# Allegro board Netduino3Wifi_13Dec16.brd
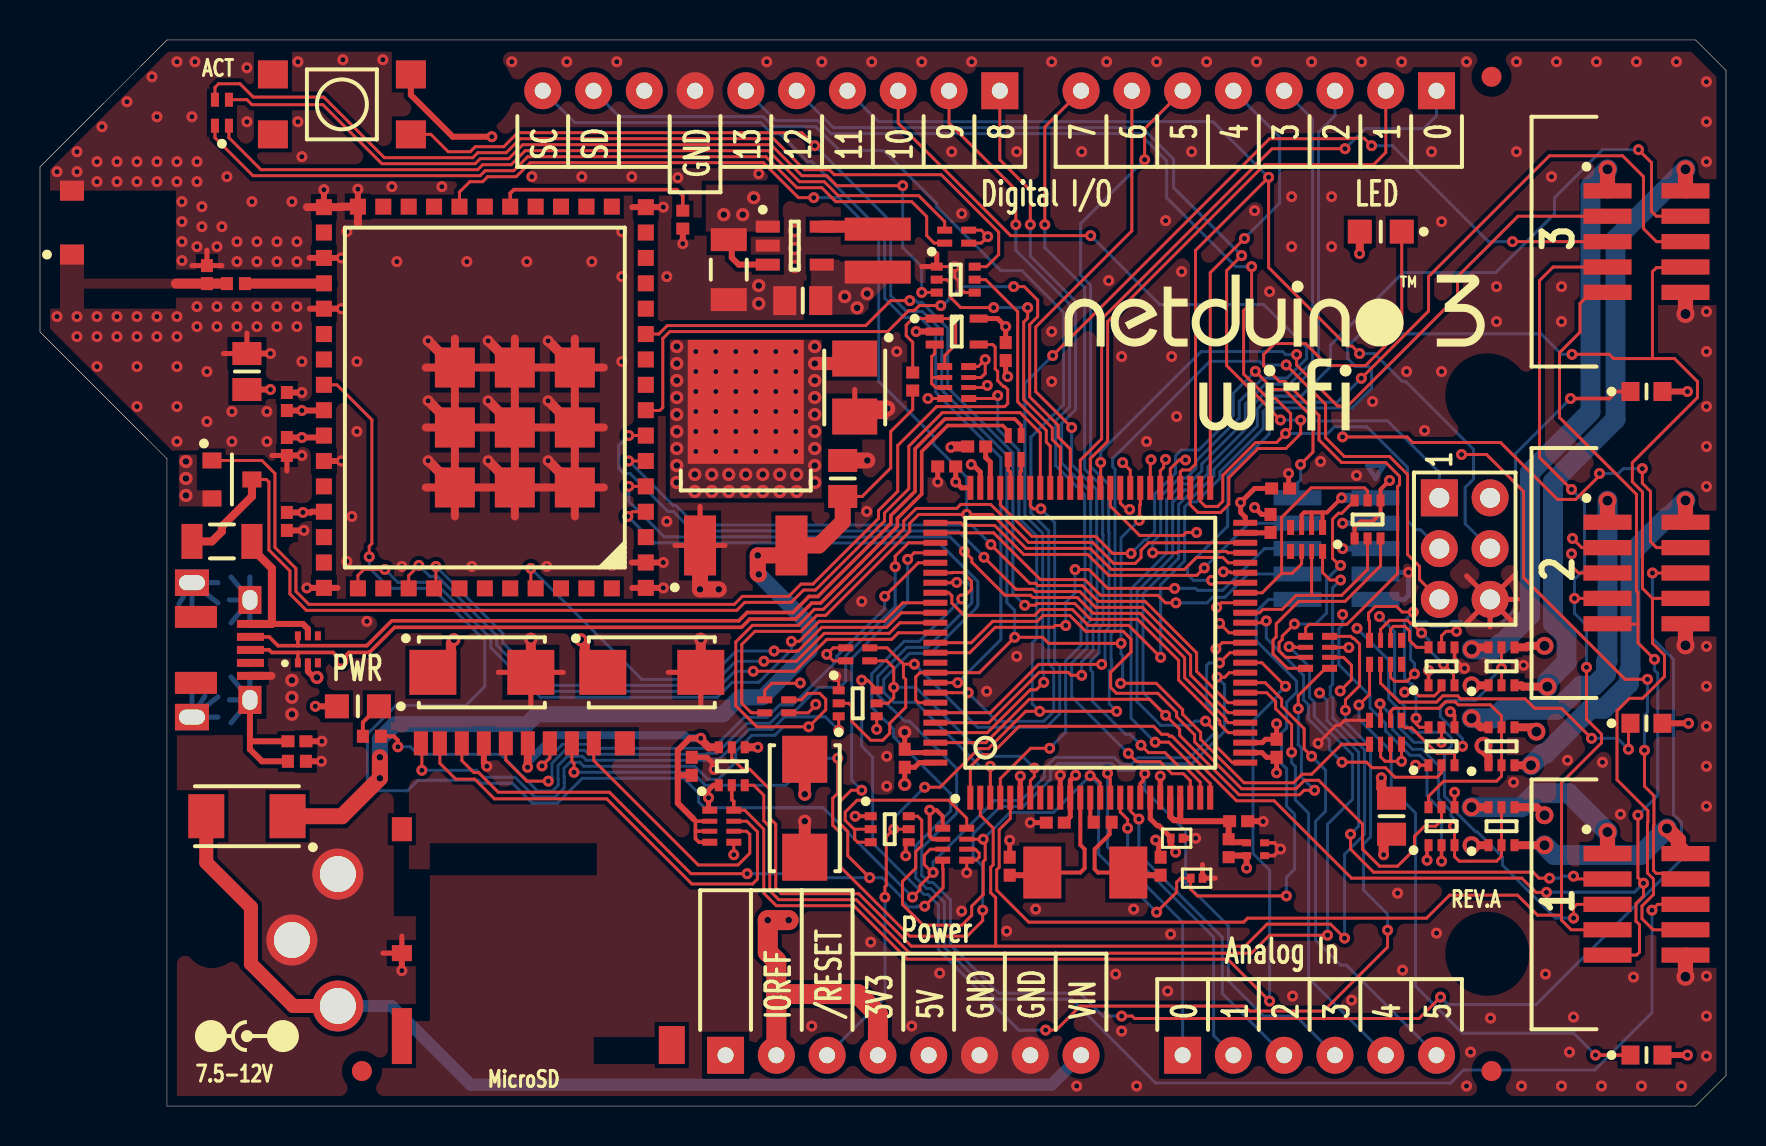
[diagram p0: board, top side]
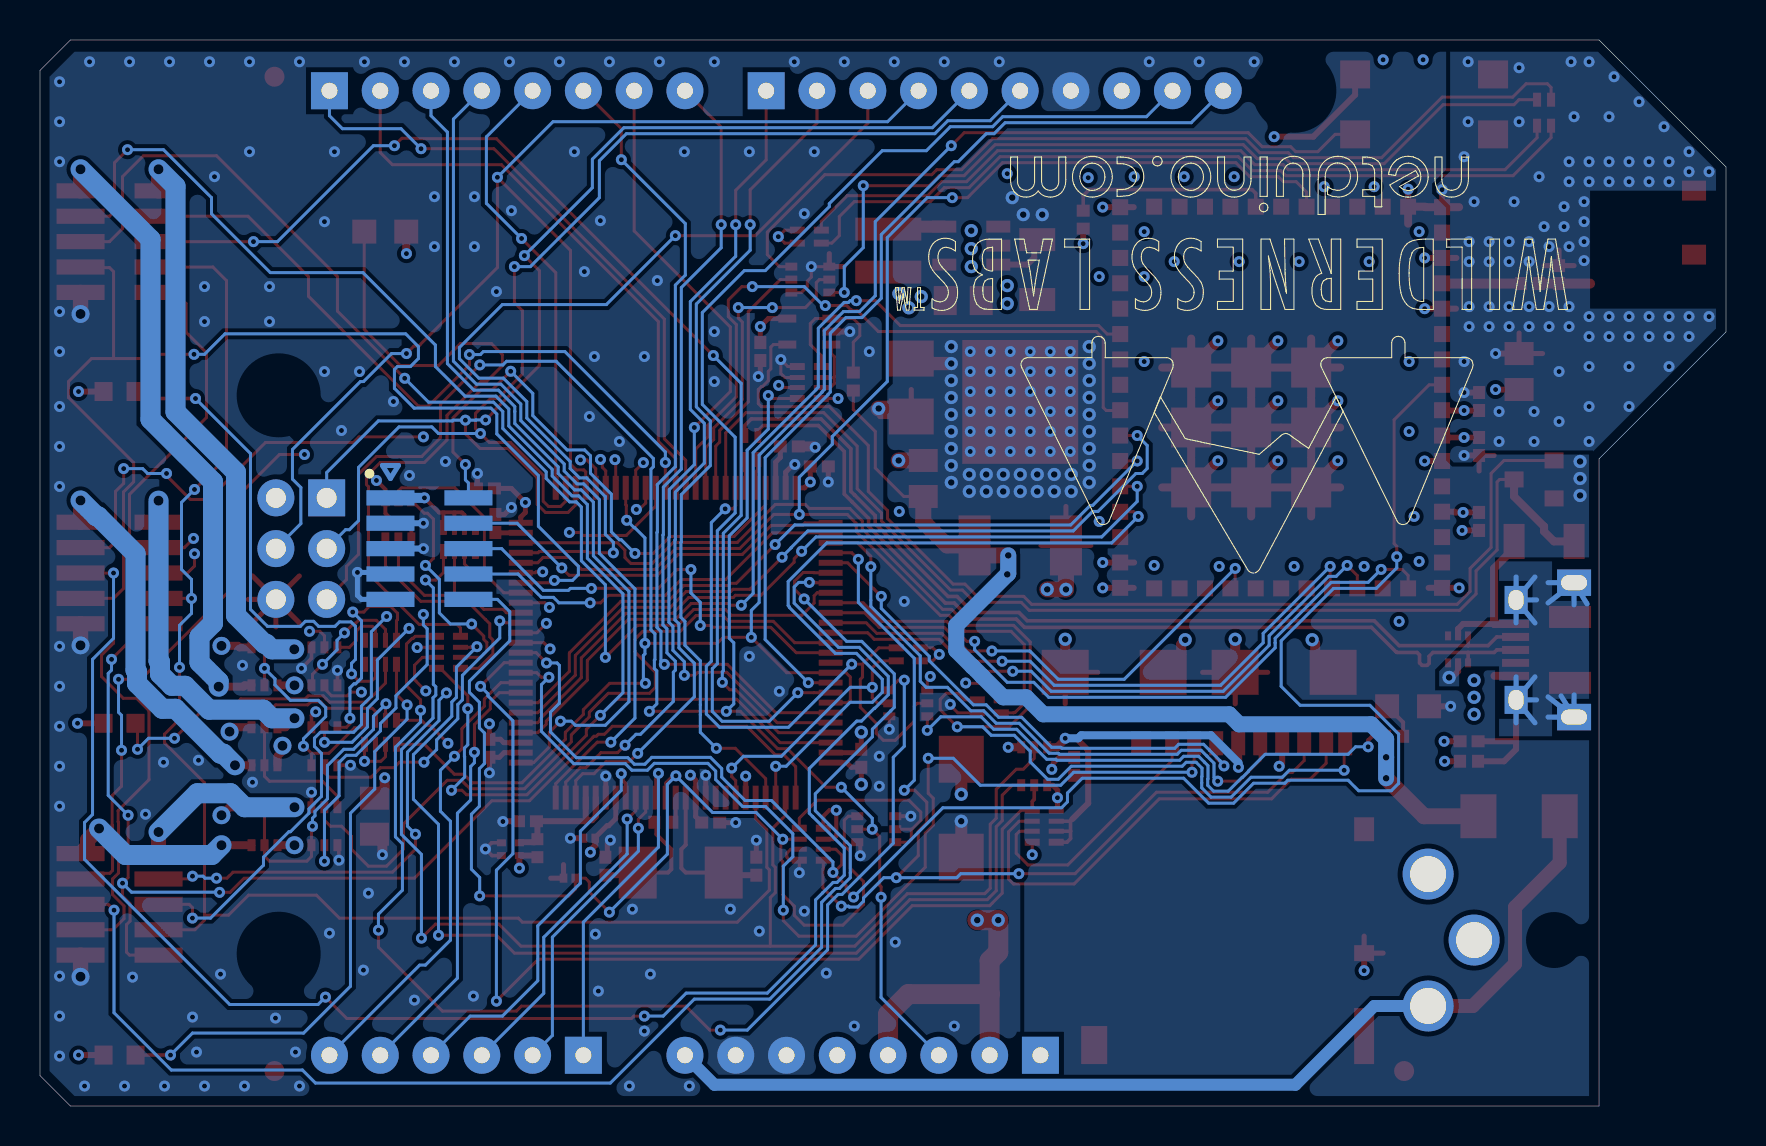
[diagram p1: board, bottom side, seen from below]

Outline 84.33 x 53.34 mm; copper layers: TOP, L2-GND, L3-PWR, BOTTOM. Coordinates in mm from the lower left corner of the outline.
Outline path: 0,46.99 0,38.73 6.35,32.38 6.35,0 82.8,0 84.33,1.52 84.33,51.82 82.8,53.34 6.35,53.34 0,46.99

## Placement (name value [footprint] x y rotation side)
C1  22uF  [CAPC3216X180N]  34.45 41.85 270 top
C2  10uF  [CAPC2012X125N]  40.15 31.4 90 top
C4  22uF  [CAPC2012X125N]  38.15 40.3 180 top
C5  0.1uF  [CAPC1005X55N]  59.95 14.25 0 top
C6  0.1uF  [CAPC1005X55N]  48.3 37.75 270 top
C7  1uF  [GNM1M2]  60.8 12.85 0 top
C9  0.1uF  [CAP-0201]  56.85 13.4 0 top
C10  0.1uF  [CAPC1005X55N]  50.78 14.18 180 top
C11  0.1uF  [CAPC1005X55N]  61.85 17.9 270 top
C12  0.1uF  [CAPC1005X55N]  62.05 30.9 0 top
C13  0.1uF  [CAPC1005X55N]  45.35 32 180 top
C14  0.1uF  [CAPC1005X55N]  43.25 17.4 90 top
C16  0.1uF  [CAPC1005X55N]  46.85 33 180 top
C17  2.2uF  [CAPC1005X55N]  61.55 29.15 90 top
C18  18pF  [CAPC1005X55N]  48.5 12 90 top
C19  18pF  [CAPC1005X55N]  56.05 12 90 top
C20  4.7nF  [CAPC1005X55N]  12.85 18.25 180 top
C21  100uF  [CAPMP6032X280N]  38.25 14.9 270 top
C22  0.1uF  [CAPC1005X55N]  32.6 17 90 top
C42  22uF  [CAPC2012X125N]  67.6 14.5 270 top
C43  47uF  [F931A476MBA]  40.75 35.95 270 top
C44  1pF  [CAPC1005X55N]  8.35 41.6 90 top
C47  22uF  [CAPC2012X125N]  10.35 36.75 90 top
C48  0.1uF  [CAPC1005X55N]  12.35 29.25 270 top
C49  0.1uF  [CAPC1005X55N]  12.35 35.25 90 top
C50  0.1uF  [CAPC1005X55N]  12.35 33 270 top
C51  100uF  [CAPMP6032X280N]  22.1 21.7 0 top
C52  100uF  [CAPMP6032X280N]  30.6 21.7 0 top
C53  0.1uF  [CAP-0201]  57.85 11.4 0 top
D1  WHITE  [LEDC2012X110N]  15.9 20 180 top
D2  BLUE  [LEDC2012X110N]  67.06 43.75 180 top
D3  SS15E-TP  [SS15-TP]  10.35 14.5 180 top
D4  -  [SP3003-04XTG]  13.4 22.85 90 top
D5  BLUE  [LEDC1608X80N]  80.35 2.55 0 top
D6  BLUE  [LEDC1608X80N]  80.35 19.15 0 top
D7  BLUE  [LEDC1608X80N]  80.35 35.75 0 top
D9  LTST-C295KGKSKT  [LTST-C295]  9.1 49.7 90 top
F1  MF-NSMF075-2  [RESC3216X100N]  9.1 28.25 180 top
F2  -  [FID_1-00_X_2-00]  16.1 1.75 0 top
F3  -  [FID_1-00_X_2-00]  72.6 1.75 0 top
F4  -  [FID_1-00_X_2-00]  72.6 51.5 0 top
J1  -  [ADC-043A-1]  14.9 8.31 90 top
J2  HDR100IMP08F-G-V-TH-BLUE  [HDR100IMP08F-G-V-TH]  69.85 50.8 180 top
J3  HDR100IMP08F-G-V-TH-BLUE  [HDR100IMP10F-G-V-TH]  48.01 50.8 180 top
J4  HDR100IMP08F-G-V-TH-BLUE  [HDR100IMP06F-G-V-TH]  57.15 2.54 0 top
J5  -  [DX4R005JJ2R1800]  6.35 22.82 270 top
J6  HDR100IMP08F-G-V-TH-BLUE  [HDR100IMP08F-G-V-TH]  34.29 2.54 0 top
J7  -  [67996-206HLF]  69.99 30.43 270 top
J8  -  [MINI_JTAG_SMD]  64.85 27.89 180 bottom
J9  DM3AT-SF-PEJM5  [DM3AT-SF-PEJ]  27.7 17.55 0 top
J10  HDR050IDC10MS2-G-V-SM-BLUE  [20021521-00010T1LF]  80.35 10.09 0 top
J11  HDR050IDC10MS2-G-V-SM-BLUE  [20021521-00010T1LF]  80.35 26.67 0 top
J12  HDR050IDC10MS2-G-V-SM-BLUE  [20021521-00010T1LF]  80.35 43.25 0 top
J13  2.45GHz Antenna  [AH316M245001-T]  1.6 44.2 90 top
L1  2.2uH  [LQH3NPN2R2NM0L]  41.9 42.8 270 top
L2  BEAD FERRITE/SM  [INDC1005X55N]  59.45 12.9 270 top
L3  3.6nH  [RESC1005X40AN]  9.8 41.15 180 top
MT1  -  [MTG320H420NP_720KO]  21.59 50.8 0 top
MT2  -  [MTG320H420NP_720KO]  72.39 35.56 0 top
MT3  -  [MTG320H420NP_720KO]  72.39 7.62 0 top
NOREF  -  []  10.35 3.5 0 top
NOREF#2  -  []  0 38.73 90 top
NOREF#3  -  []  6.35 32.38 90 top
NOREF#4  -  []  6.35 53.34 0 top
NOREF#5  -  []  6.35 0 90 top
NOREF#6  -  []  51.25 38 0 top
NOREF#7  -  []  0 46.99 0 top
NOREF#8  -  []  0 46.99 0 top
Q1  -  [MUN5215DW1T1G]  40.9 20.15 0 top
Q2  -  [MUN5215DW1T1G]  42.5 13.85 0 top
Q3  -  [NTR4101PT1G]  9.6 31.35 0 top
Q4  -  [NTJD4152PT1G]  34.6 17 90 top
Q5  -  [NTJD4152PT1G]  73.1 14 90 top
Q6  -  [MUN5215DW1T1G]  70.1 14 90 top
Q7  -  [NTJD4152PT1G]  73.1 18 90 top
Q8  -  [NTJD4152PT1G]  66.4 29.35 90 top
Q9  -  [NTJD4152PT1G]  73.1 22 90 top
Q10  -  [MUN5215DW1T1G]  70.1 18 90 top
Q11  -  [MUN5215DW1T1G]  70.1 22 90 top
Q12  -  [MUN5215DW1T1G]  45.8 41.35 0 top
R1  1K  [RESCAV50P80X160X60-8N]  63.9 22.7 0 top
R3  1.5K  [RESC1005X40AN]  16.6 18.5 0 top
R4  10K  [RESCAV50P80X160X60-8N]  45.85 36.2 0 top
R5  10K  [RESCAV50P80X160X60-8N]  45.75 13.1 0 top
R6  15.4K  [RESC1005X40AN]  43.65 36.25 90 top
R7  390  [RESC1005X40AN]  53.15 14.2 180 top
R8  10K  [EXB24V]  40.9 22.6 0 top
R9  22  [EXB24V]  48.75 32.95 270 top
R10  1M  [RESC1005X40AN]  12.85 17.25 180 top
R11  10K  [RESCAV50P80X160X60-8N]  34.1 14 0 top
R12  10K  [RESCAV50P80X160X60-8N]  67.3 18.7 90 top
R13  10K  [EXB24V]  36.85 20 0 top
R14  10K  [RESCAV50P80X160X60-8N]  63.35 28.35 270 top
R15  1K  [RESCAV50P80X160X60-8N]  67.3 22.7 90 top
R16  1.5K  [EXB24V]  45.85 43.5 180 top
R18  100K  [RESC1005X40AN]  32.15 44.35 270 top
SW1  -  [TSXH-2GL]  15.1 50.12 0 top
U1  LM3671MF-3.3/NOPB  [LM3671MF]  37.75 43.05 0 top
U2  -  [TLV1117-50IKVURG3]  35.3 28.05 90 top
U3  -  [LMV321IDCKR]  45.85 38.75 0 top
U4  STM32F427  [STM32F427VIT6]  52.53 23.18 90 top
U5  -  [CC3100MOD]  22.25 35.45 90 top
Y1  25.00MHz  [ABM7]  52.28 11.68 180 top

## Library data of the parts
C1 C2 C4-C6 C9-C14 C16-C22 C42-C44 C47-C53 = C
C7 = GNM1M2
D1 = LED_2
D2 D5-D7 = LED_1
D3 = D05AZ75_0
D4 = HEADER 6_0
D9 = LED_0
F1 = FUSE
F2-F4 MT1-MT3 = MOUNT_HOLE
J1 = HEADER 3
J2 J6 = HEADER 8
J3 = HEADER 10
J4 = HEADER 6
J5 = HEADER 11_0
J7 = HEADER 6_1
J8 J10-J12 = HEADER 10_2
J9 = HEADER 10_4
J13 = HEADER 2_0
L1 L3 = L
L2 = BEAD FERRITE/SM
Q1 Q2 Q12 = MUN5215DW1T1G_3
Q3 = NDF0610/TO_1
Q4 Q5 Q7-Q9 = NTJD4152PT1G
Q6 Q10 Q11 = MUN5215DW1T1G_0
R1 R4 R5 R11 R12 R14 R15 = RESCAV50P80X160X60-8N
R3 R6 R7 R10 R18 = R
R8 R9 R13 R16 = EXB24V
SW1 = SW PUSHBUTTON-SPST-2_0
U1 = HEADER 5_0
U2 = LM7805/TO_2
U3 = LMV321/SO
U4 = STM32F427_0
U5 = CC3100MOD_WIFI_MODULE_1
Y1 = CRYSTAL

## Footprints (pads in the part's own frame, mm; a bottom-side part is the same pattern mirrored in y, then rotated)
67996-206HLF
  rect 1.85x1.85 hole 1: 1(0,0)
  round 1.85 hole 1: 2(0,2.54) 3(2.54,0) 4(2.54,2.54) 5(5.08,0) 6(5.08,2.54)
20021521-00010T1LF
  rect 2.4x0.76 smd: 1(-1.95,2.54) 2(1.95,2.54) 3(-1.95,1.27) 4(1.95,1.27) 5(-1.95,0) 6(1.95,0) 7(-1.95,-1.27) 8(1.95,-1.27) 9(-1.95,-2.54) 10(1.95,-2.54)
ABM7
  rect 1.9x2.6 smd: 1(-2.15,0) 2(2.15,0)
ADC-043A-1
  round 0 hole 2.4 unplated: (0,6.3)
  round 2.55 hole 1.8: 1(-3.3,0) 2(0,2.3) 3(3.3,0)
AH316M245001-T
  rect 1x1.2 smd: 1(-1.6,0) 2(1.6,0)
CAP-0201
  rect 0.381x0.457 smd: 1(-0.292,0) 2(0.292,0)
CAPC1005X55N
  rect 0.65x0.6 smd: 1(-0.45,0) 2(0.45,0)
CAPC2012X125N
  rect 1.15x1.45 smd: 1(-0.9,0) 2(0.9,0)
CAPC3216X180N
  rect 1.15x1.8 smd: 1(-1.5,0) 2(1.5,0)
CAPMP6032X280N
  rect 2.35x2.25 smd: 1(-2.45,0) 2(2.45,0)
CC3100MOD
  rect 0.8x0.8 smd: 1(-9.525,-8.05) 2(-8.255,-8.05) 3(-6.985,-8.05) 4(-5.715,-8.05) 5(-4.445,-8.05) 6(-3.175,-8.05) 7(-1.905,-8.05) 8(-0.635,-8.05) 9(0.635,-8.05) 10(1.905,-8.05) 11(3.175,-8.05) 12(4.445,-8.05) 13(5.715,-8.05) 14(6.985,-8.05) 15(8.255,-8.05) 16(9.525,-8.05) 17(9.55,-6.35) 18(9.55,-5.08) 19(9.55,-3.81) 20(9.55,-2.54) 21(9.55,-1.27) 22(9.55,0) 23(9.55,1.27) 24(9.55,2.54) 25(9.55,3.81) 26(9.55,5.08) 27(9.55,6.35) 28(9.525,8.05) 29(8.255,8.05) 30(6.985,8.05) 31(5.715,8.05) 32(4.445,8.05) 33(3.175,8.05) 34(1.905,8.05) 35(0.635,8.05) 36(-0.635,8.05) 37(-1.905,8.05) 38(-3.175,8.05) 39(-4.445,8.05) 40(-5.715,8.05) 41(-6.985,8.05) 42(-8.255,8.05) 43(-9.525,8.05) 44(-9.55,6.35) 45(-9.55,5.08) 46(-9.55,3.81) 47(-9.55,2.54) 48(-9.55,1.27) 49(-9.55,0) 50(-9.55,-1.27) 51(-9.55,-2.54) 52(-9.55,-3.81) 53(-9.55,-5.08) 54(-9.55,-6.35)
  rect 2x2 smd: 55(-4.5,-4.5) 56(-1.5,-4.5) 57(1.5,-4.5) 58(-4.5,-1.5) 59(-1.5,-1.5) 60(1.5,-1.5) 61(-4.5,1.5) 62(-1.5,1.5) 63(1.5,1.5)
DM3AT-SF-PEJ
  rect 0.7x1.2 smd: 1(0,0.6) 2(-1.1,0.6) 3(-2.2,0.6) 4(-3.3,0.6) 5(-4.4,0.6) 6(-5.5,0.6) 7(-6.6,0.6) 8(-7.7,0.6) 9(-8.65,0.6)
  rect 1x0.8 smd: 10(-9.6,-9.9)
  rect 1x1.2 smd: 11(-9.6,-3.7) 14(1.55,0.6)
  rect 1x2.8 smd: 12(-9.6,-14.05)
  rect 1.3x1.9 smd: 13(3.9,-14.5)
DX4R005JJ2R1800
  rect 0.4x1.35 smd: 1(-1.3,4.175) 2(-0.65,4.175) 3(0,4.175) 4(0.65,4.175) 5(1.3,4.175)
  rect 1.4x1.15 hole 1x0.75: 6(-2.5,4.15) 7(2.5,4.15)
  rect 1.325x1.7 hole 0.75x1.3: 8(-3.362,1.25) 11(3.362,1.25)
  rect 1.1x2.1 smd: 9(-1.65,1.45) 10(1.65,1.45)
EXB24V
  rect 0.75x0.35 smd: 1(-0.6,0.325) 2(-0.6,-0.325) 3(0.6,-0.325) 4(0.6,0.325)
F931A476MBA
  rect 1.8x2.25 smd: 1(-1.45,0) 2(1.45,0)
FID_1-00_X_2-00
  round 1 smd: 1(0,0)
GNM1M2
  rect 0.45x0.35 smd: 1(-0.45,0.32) 2(-0.45,-0.32) 3(0.45,-0.32) 4(0.45,0.32)
HDR100IMP06F-G-V-TH
  rect 1.85x1.85 hole 0.8: 1(0,0)
  round 1.85 hole 0.8: 2(2.54,0) 3(5.08,0) 4(7.62,0) 5(10.16,0) 6(12.7,0)
HDR100IMP08F-G-V-TH
  rect 1.85x1.85 hole 0.8: 1(0,0)
  round 1.85 hole 0.8: 2(2.54,0) 3(5.08,0) 4(7.62,0) 5(10.16,0) 6(12.7,0) 7(15.24,0) 8(17.78,0)
HDR100IMP10F-G-V-TH
  rect 1.85x1.85 hole 0.8: 1(0,0)
  round 1.85 hole 0.8: 2(2.54,0) 3(5.08,0) 4(7.62,0) 5(10.16,0) 6(12.7,0) 7(15.24,0) 8(17.78,0) 9(20.32,0) 10(22.86,0)
INDC1005X55N
  rect 0.6x0.6 smd: 1(-0.45,0) 2(0.45,0)
LEDC1608X80N
  rect 0.899x0.95 smd: A(0.8,0) C(-0.8,0)
LEDC2012X110N
  rect 1.2x1.2 smd: A(1.05,0) C(-1.05,0)
LM3671MF
  rect 1.2x0.6 smd: 1(-1.35,0.95) 2(-1.35,0) 3(-1.35,-0.95) 4(1.35,-0.95) 5(1.35,0.95)
LMV321IDCKR
  rect 0.9x0.4 smd: 1(-1.1,0.65) 2(-1.1,0) 3(-1.1,-0.65) 4(1.1,-0.65) 5(1.1,0.65)
LQH3NPN2R2NM0L
  rect 1.15x3.3 smd: 1(-1.075,0) 2(1.075,0)
LTST-C295
  rect 0.7x0.4 smd: 1(-0.65,0.35) 2(-0.65,-0.35) 3(0.65,0.35) 4(0.65,-0.35)
MINI_JTAG_SMD
  rect 2.4x0.76 smd: 1(-1.95,2.54) 2(1.95,2.54) 3(-1.95,1.27) 4(1.95,1.27) 5(-1.95,0) 6(1.95,0) 7(-1.95,-1.27) 8(1.95,-1.27) 9(-1.95,-2.54) 10(1.95,-2.54)
MTG320H420NP_720KO
  round 0 hole 3.2 unplated: (0,0)
MUN5215DW1T1G
  rect 0.6x0.4 smd: 1(-0.95,0.65) 2(-0.95,0) 3(-0.95,-0.65) 4(0.95,-0.65) 5(0.95,0) 6(0.95,0.65)
NTJD4152PT1G
  rect 0.6x0.4 smd: 1(-0.95,0.65) 2(-0.95,0) 3(-0.95,-0.65) 4(0.95,-0.65) 5(0.95,0) 6(0.95,0.65)
NTR4101PT1G
  rect 0.95x0.8 smd: 1(-1,0.95) 2(-1,-0.95) 3(1,0)
RESC1005X40AN
  rect 0.6x0.65 smd: 1(-0.45,0) 2(0.45,0)
RESC3216X100N
  rect 1.05x1.75 smd: 1(-1.5,0) 2(1.5,0)
RESCAV50P80X160X60-8N
  rect 0.75x0.35 smd: 1(-0.6,0.8) 4(-0.6,-0.8) 5(0.6,-0.8) 8(0.6,0.8)
  rect 0.75x0.25 smd: 2(-0.6,0.25) 3(-0.6,-0.25) 6(0.6,-0.25) 7(0.6,0.25)
SP3003-04XTG
  rect 0.45x0.3 smd: 1(-0.675,0.5) 2(-0.675,0) 3(-0.675,-0.5) 4(0.675,-0.5) 5(0.675,0) 6(0.675,0.5)
SS15-TP
  rect 1.8x2.2 smd: A(2.032,0) C(-2.032,0)
STM32F427VIT6
  rect 1.2x0.3 smd: 1(-7.75,6) 2(-7.75,5.5) 3(-7.75,5) 4(-7.75,4.5) 5(-7.75,4) 6(-7.75,3.5) 7(-7.75,3) 8(-7.75,2.5) 9(-7.75,2) 10(-7.75,1.5) 11(-7.75,1) 12(-7.75,0.5) 13(-7.75,0) 14(-7.75,-0.5) 15(-7.75,-1) 16(-7.75,-1.5) 17(-7.75,-2) 18(-7.75,-2.5) 19(-7.75,-3) 20(-7.75,-3.5) 21(-7.75,-4) 22(-7.75,-4.5) 23(-7.75,-5) 24(-7.75,-5.5) 25(-7.75,-6) 51(7.75,-6) 52(7.75,-5.5) 53(7.75,-5) 54(7.75,-4.5) 55(7.75,-4) 56(7.75,-3.5) 57(7.75,-3) 58(7.75,-2.5) 59(7.75,-2) 60(7.75,-1.5) 61(7.75,-1) 62(7.75,-0.5) 63(7.75,0) 64(7.75,0.5) 65(7.75,1) 66(7.75,1.5) 67(7.75,2) 68(7.75,2.5) 69(7.75,3) 70(7.75,3.5) 71(7.75,4) 72(7.75,4.5) 73(7.75,5) 74(7.75,5.5) 75(7.75,6)
  rect 0.3x1.2 smd: 26(-6,-7.75) 27(-5.5,-7.75) 28(-5,-7.75) 29(-4.5,-7.75) 30(-4,-7.75) 31(-3.5,-7.75) 32(-3,-7.75) 33(-2.5,-7.75) 34(-2,-7.75) 35(-1.5,-7.75) 36(-1,-7.75) 37(-0.5,-7.75) 38(0,-7.75) 39(0.5,-7.75) 40(1,-7.75) 41(1.5,-7.75) 42(2,-7.75) 43(2.5,-7.75) 44(3,-7.75) 45(3.5,-7.75) 46(4,-7.75) 47(4.5,-7.75) 48(5,-7.75) 49(5.5,-7.75) 50(6,-7.75) 76(6,7.75) 77(5.5,7.75) 78(5,7.75) 79(4.5,7.75) 80(4,7.75) 81(3.5,7.75) 82(3,7.75) 83(2.5,7.75) 84(2,7.75) 85(1.5,7.75) 86(1,7.75) 87(0.5,7.75) 88(0,7.75) 89(-0.5,7.75) 90(-1,7.75) 91(-1.5,7.75) 92(-2,7.75) 93(-2.5,7.75) 94(-3,7.75) 95(-3.5,7.75) 96(-4,7.75) 97(-4.5,7.75) 98(-5,7.75) 99(-5.5,7.75) 100(-6,7.75)
TLV1117-50IKVURG3
  rect 3x1.6 smd: 1(0,2.286) 3(0,-2.286)
  rect 6.2x5.8 smd: 4(7.18,0)
TSXH-2GL
  rect 1.5x1.4 smd: 1(-3.45,1.5) 2(3.45,1.5) 3(-3.45,-1.5) 4(3.45,-1.5)

## Nets
3V3_GOPORT1: J10.1(3V3) Q5.6(DRAIN)
3V3_GOPORT2: J11.1(3V3) Q7.6(DRAIN)
3V3_GOPORT3: J12.1(3V3) Q9.6(DRAIN)
5V_GOPORT1: J10.2(5V) Q5.3(DRAIN)
5V_GOPORT2: J11.2(5V) Q7.3(DRAIN)
5V_GOPORT3: J12.2(5V) Q9.3(DRAIN)
+3.3V: C4.1 C7.2(1) C9.1 C10.1 C11.1 C12.1 C13.1 C14.1 C21.1 C42.1 C47.1 C48.1 C49.1 C50.1 C51.1 C52.1 J6.2 J6.4 J8.1(VCC) L1.2 L2.2 Q4.1(SOURCE) Q4.4(SOURCE) Q5.1(SOURCE) Q7.1(SOURCE) Q8.1(SOURCE) Q8.4(SOURCE) Q9.1(SOURCE) R4.4(1) R5.1 R5.2(1) R8.1 R8.2(1) R11.1 R13.1 R14.1 R14.2(1) R14.3(1) R16.1 R16.2(1) SW1.2 U1.4(FB) U4.6(VBAT) U4.11(VDD1) U4.19(VDD2) U4.28(VDD3) U4.50(VDD4) U4.75(VDD5) U4.100(VDD6) U5.36(VBAT_IN1) U5.37(VBAT_IN2) U5.40(VBAT_IN3)
+3V3_MICROSD: C22.1 J9.4(VDD) Q4.6(DRAIN) R11.2(1) R11.3(1) R11.4(1)
+5.0V: C1.1 C6.1 C43.1 D1.A(ANODE) D2.A(ANODE) D5.A(ANODE) D6.A(ANODE) D7.A(ANODE) J6.5 J7.2(VTG) Q3.2(SOURCE) Q5.4(SOURCE) Q7.4(SOURCE) Q9.4(SOURCE) R4.6(2) R12.2(1) R12.3(1) R12.4(1) U1.1(VIN) U1.3(EN) U2.4(VOUT) U3.5(+VCC)
+VIN: D3.A(1) J1.1 J6.8
+VIN_PROTECTED: C2.1 D3.C(2) R6.1 U2.3(VIN)
GND: C1.2 C2.2 C4.2 C5.2 C6.2 C7.3 C7.4(3) C9.2 C10.2 C11.2 C12.2 C13.2 C14.2 C16.2 C17.2 C18.2 C19.2 C20.1 C21.2 C22.2 C42.2 C43.2 C44.1 C44.2 C47.2 C48.2 C49.2 C50.2 C51.2 C52.2 C53.2 J1.2 J1.3 J3.7 J5.5(GND) J6.6 J6.7 J7.6(GND) J8.3(GND1) J8.5(GND2) J8.7(GND3) J8.9(GND4) J9.6(VSS) J9.10(SW_GND) J10.10(GND) J11.10(GND) J12.10(GND) J13.1 J13.2 L3.2 Q1.1(E) Q1.4(E) Q2.1(E) Q2.4(E) Q6.1(E) Q6.4(E) Q10.1(E) Q10.4(E) Q11.1(E) Q11.4(E) Q12.1(E) Q12.4(E) R4.7(2) R4.8(2) R5.5(2) R5.6(2) R10.1 R11.5(2) R12.8(2) R13.3(2) R18.2 U1.2(GND) U2.1(GND) U3.2(-VCC) U4.10(VSS1) U4.20(VSSA) U4.27(VSS2) U4.74(VSS3) U4.99(VSS4) U5.1(GND1) U5.2(GND2) U5.16(GND3) U5.27(GND4) U5.28(GND18) U5.30(GND5) U5.32(GND6) U5.38(GND7) U5.43(GND8) U5.55(GND9) U5.56(GND10) U5.57(GND11) U5.58(GND12) U5.59(GND13) U5.60(GND14) U5.61(GND15) U5.62(GND16) U5.63(GND17)
VIN_COMP_LOGIC: Q3.1(GATE) U3.4(OUT)
VIN_REF: R4.2(1) R4.3(1) U3.3(-VIN)
/CC_CS: U4.65(PC8) U5.8(SPI_CS)
/CC_HIB: U4.3(PE4) U5.4(NHIB)
/CC_RESET: R5.3(1) U4.37(PB2) U5.35(RESRT_N)
/ENABLE_UART_TX_PULLUP_GOPORT1: Q4.5(GATE) R14.8(2) U4.2(PE3)
/ENABLE_UART_TX_PULLUP_GOPORT2: Q8.2(GATE) R14.7(2) U4.41(PE10)
/ENABLE_UART_TX_PULLUP_GOPORT3: Q8.5(GATE) R14.6(2) U4.43(PE12)
/EXTERNAL_RESET: J6.3 J7.5(R\E\S\E\T\) Q2.5(B) R4.5(2)
/INT_GOPORT1: J10.3(GIPO) U4.60(PD13)
/INT_GOPORT2: J11.3(GIPO) U4.61(PD14)
/INT_GOPORT3: J12.3(GIPO) U4.62(PD15)
/MICRO_SD_CARD_INSERTED: J9.9(C\A\R\D\_\I\N\_\S\W\) R13.4(2) U4.48(PB11)
/MICROSD_CS: J9.2(C\S\) U4.35(PB0)
/PWR_CTRL_GOPORT1: Q5.2(GATE) Q5.5(GATE) Q6.3(C) R12.7(2)
/PWR_CTRL_GOPORT2: Q6.6(C) Q7.2(GATE) Q7.5(GATE) R12.6(2)
/PWR_CTRL_GOPORT3: Q9.2(GATE) Q9.5(GATE) Q10.3(C) R12.5(2)
/PWR_CTRL_MICROSD: Q4.2(GATE) R11.8(2) U4.36(PB1)
/RESET_MCU: C53.1 J8.10(NRST) Q2.6(C) R5.7(2) U4.14(NRST)
/SPI_CS_GOPORT1: J10.6(SPI_CS) U4.81(PD0)
/SPI_CS_GOPORT2: J11.6(SPI_CS) U4.82(PD1)
/SPI_CS_GOPORT3: J12.6(SPI_CS) U4.83(PD2)
A0: J4.1 U4.15(PC0)
A1: J4.2 U4.16(PC1)
A2: J4.3 U4.17(PC2)
A3: J4.4 U4.18(PC3)
A4: J4.5 U4.33(PC4)
A5: J4.6 U4.34(PC5)
CC_CTS: U4.85(PD4) U5.51(UART1_CTS)
CC_IRQ: U4.29(PA4) U5.11(I\RQ)
CC_MISO: U4.31(PA6) U5.7(SPI_DOUT)
CC_MOSI: U4.32(PA7) U5.6(SPI_DIN)
CC_RTS: U4.84(PD3) U5.44(UART1_RTS)
CC_RX: U4.86(PD5) U5.47(UART1_RX)
CC_SCK: U4.30(PA5) U5.5(SPI_CLK)
CC_TCXO_EN/SOP2: R13.2(1) U4.46(PE15) U5.23(SOP2)
CC_TX: U4.87(PD6) U5.46(UART1_TX)
D0: J2.1 U4.64(PC7)
D1: J2.2 U4.63(PC6)
D2: J2.3 U4.26(PA3)
D3: J2.4 U4.25(PA2)
D4: J2.5 U4.51(PB12)
D5: J2.6 U4.95(PB8)
D6: J2.7 U4.96(PB9)
D7: J2.8 U4.24(PA1)
D8: J3.1 U4.23(PA0)
D9: J3.2 U4.4(PE5)
D10: J3.3 U4.47(PB10)
D11: J3.4 J7.4(MOSI) U4.54(PB15)
D12: J3.5 J7.1(MISO) U4.53(PB14)
D13: J3.6 J7.3(SCK) U4.52(PB13)
JTCK: J8.4(JTCK) U4.76(PA14)
JTDI: J8.8(JTDI) U4.77(PA15)
JTDO: J8.6(JTDO) U4.89(PB3)
JTMS: J8.2(JTMS) U4.72(PA13)
LED: Q1.2(B) R8.4(2) U4.69(PA10)
LED_GOPORT1: Q10.2(B) U4.40(PE9)
LED_GOPORT2: Q11.5(B) U4.42(PE11)
LED_GOPORT3: Q11.2(B) U4.45(PE14)
LINK_LED: Q12.2(B) U4.66(PC9)
OTG_FS_DM: R9.4(2) U4.70(PA11)
OTG_FS_DP: R9.3(2) U4.71(PA12)
PWR_LED: Q1.5(B) R8.3(2) U4.7(PC13)
PWR_ON_GOPORT1: Q6.5(B) U4.88(PD7)
PWR_ON_GOPORT2: Q6.2(B) U4.57(PD10)
PWR_ON_GOPORT3: Q10.5(B) U4.59(PD12)
SCL: J3.10 U4.92(PB6)
SDA: J3.9 U4.93(PB7)
SPI3_MISO: J9.7(DO) R5.4(1) U4.79(PC11)
SPI3_MOSI: J9.3(DI) U4.80(PC12)
SPI3_SCK: J9.5(CLK) U4.78(PC10)
SPI4_MISO: J10.8(SPI_MISO) J11.8(SPI_MISO) J12.8(SPI_MISO) U4.44(PE13)
SPI4_MOSI: J10.7(SPI_MOSI) J11.7(SPI_MOSI) J12.7(SPI_MOSI) U4.5(PE6)
SPI4_SCK: J10.9(SPI_SCK) J11.9(SPI_SCK) J12.9(SPI_SCK) U4.1(PE2)
STATE_LED: Q12.5(B) U4.67(PA8)
SWITCH1: R12.1 SW1.4 U4.58(PD11) U4.91(PB5) U4.94(BOOT0)
USART3_RX_GOPORT1: J10.5(USART_RX) U4.56(PD9)
USART3_TX_GOPORT1: J10.4(USART_TX) R1.7(2) U4.55(PD8)
USART7_RX_GOPORT2: J11.5(USART_RX) U4.38(PE7)
USART7_TX_GOPORT2: J11.4(USART_TX) R1.6(2) U4.39(PE8)
USART8_RX_GOPORT3: J12.5(USART_RX) U4.97(PE0)
USART8_TX_GOPORT3: J12.4(USART_TX) R1.5(2) U4.98(PE1)
USB5V: D4.5(VCC) F1.1 J5.1(VBUS)
USB5V_F: F1.2 Q3.3(DRAIN) U4.68(PA9)
USB_D+: D4.1(I/O1) J5.3(D+) R9.2(1)
USB_D-: D4.6(I/O4) J5.2(D-) R9.1
VCAP_1: C17.1 U4.49(VCAP_1)
VCAP_2: C16.1 U4.73(VCAP_2)
N61621: C20.2 D4.2(GND) J5.6(CHS1) J5.7(CHS2) J5.8(CHS3) J5.11(CHS4) R10.2
N62667: R4.1 R6.2 U3.1(+VIN)
N62753: Q2.2(B) Q2.3(C) R5.8(2)
N62779: L1.1 U1.5(SW)
N62801: D2.C(CATHODE) R1.1
N62883: J9.1(NC) R11.6(2)
N62887: J9.8(RSV) R11.7(2)
N63081: C5.1 C7.1 L2.1 U4.21(VREF+) U4.22(VDDA)
N63113: C18.1 U4.12(PH0) Y1.2
N63117: R7.2 U4.13(PH1)
N63121: C19.1 R7.1 Y1.1
N74908: Q1.6(C) R1.8(2)
N77511: D1.C(CATHODE) R3.1
N77515: Q1.3(C) R3.2
N83970: D9.4(CATHODE_4) Q12.3(C)
N84209: D9.3(CATHODE_1) Q12.6(C)
N89038: L3.1 U5.31(RF_BG)
N89104: D9.2(ANODE_2) R16.3(2)
N89108: D9.1(ANODE_1) R16.4(2)
N89134: R18.1 U5.21(RESERVED#21)
N197515: Q10.6(C) R15.8(2)
N197535: D5.C(CATHODE) R15.1
N197921: Q11.3(C) R15.7(2)
N197949: D6.C(CATHODE) R15.2(1)
N198166: Q11.6(C) R15.6(2)
N198194: D7.C(CATHODE) R15.3(1)
N199051: Q4.3(DRAIN) R1.2(1)
N202411: Q8.6(DRAIN) R1.3(1)
N203046: Q8.3(DRAIN) R1.4(1)

Pads without a net: D4 3 4; F2 1; F3 1; F4 1; J3 8; J5 4 9 10; J6 1; J9 11 12 13 14; R14 4 5; R15 4 5; SW1 1 3; U4 8 9 90; U5 3 9 10 12 13 14 15 17 18 19 20 22 24 25 26 29 33 34 39 41 42 45 48 49 50 52 53 54

## Via types
v1: diameter 0.55, hole 0.25, TOP to BOTTOM, 553 vias
v2: diameter 0.9, hole 0.5, TOP to BOTTOM, 21 vias
v3: diameter 0.66, hole 0.33, TOP to BOTTOM, 68 vias

## Routing (per net, layer and track width the routed paths; a pad name or vN(x,y) marks a point on that pad's centre or on a via; arc(x,y) is an arc through that point)
3V3_GOPORT1: length 9.8
  TOP w0.4: Q5.6 v2(71.6,14.95)
  TOP w0.76: J10.1 v2(78.4,13.71)
  BOTTOM w1: v2(71.6,14.95) 74.09,14.95 74.79,15.65 76.46,15.65 v2(78.4,13.71)
3V3_GOPORT2: length 18.5
  TOP w0.4: v2(71.6,19.4) 72.05,18.95 Q7.6
  TOP w0.76: J11.1 v2(78.4,30.29)
  BOTTOM w1: v2(78.4,30.29) 78.4,22.28 78.32,22.21 78.32,21.62 77.73,21.02 77.06,21.02 75.87,19.83 73.16,19.83 72.72,19.4 v2(71.6,19.4)
3V3_GOPORT3: length 29.5
  TOP w0.4: v2(71.61,22.85) 71.71,22.95 Q9.6
  TOP w0.76: J12.1 v2(78.4,46.87)
  BOTTOM w1: v2(78.4,46.87) 77.55,46.02 77.55,34.73 74.52,31.71 74.52,24.55 73.1,23.13 73.01,23.13 72.73,22.85 v2(71.61,22.85)
5V_GOPORT1: length 10
  TOP w0.4: Q5.3 v2(75.25,13.05)
  TOP w0.76: v2(81.37,13.89) 81.95,13.31 81.95,12.98 J10.2
  BOTTOM w1: v2(75.25,13.05) 75.74,12.56 80.05,12.56 v2(81.37,13.89)
5V_GOPORT2: length 18.9
  TOP w0.4: Q7.3 v2(74.57,17.05)
  TOP w0.76: v2(82.3,30.3) J11.2
  BOTTOM w1: v2(82.3,30.3) 81.5,29.5 81.42,29.5 79.55,27.64 79.55,21.81 79.47,21.73 79.47,21.14 78.21,19.88 77.55,19.88 75.3,17.63 75.16,17.63 v2(74.57,17.05)
5V_GOPORT3: length 32.1
  TOP w0.4: Q9.3 74.09,21.05 74.16,20.98 v2(75.39,20.98)
  TOP w0.76: J12.2 v2(82.3,46.87)
  BOTTOM w1: v2(82.3,46.87) 78.8,43.37 78.8,34.36 75.67,31.23 75.67,24.16 76.35,23.48 76.35,22.2 75.39,21.24 v2(75.39,20.98)
+3.3V: length 79.7
  TOP w0.15: R16.1 47.08,43.17 v1(47.4,43.5) 47.08,43.83 R16.2 ; R13.1 36.25,20.8 36.6,21.15 38.05,21.15 38.05,21.17 v1(38.03,21.17) ; R4.4 v1(44.41,35.4) ; R8.2 39.68,22.27 v1(39.35,22.6) 39.68,22.93 R8.1
  TOP w0.2: R5.1 45.15,14.5 44.85,14.8 v1(44.5,14.8) 44.5,13.5 44.65,13.35 R5.2 ; 64.15,29.7 R14.1 ; 64.15,29.7 63.6,29.7 ; 64.15,29.7 64.37,29.7 v1(65.1,30.43) ; 63.6,29.7 63.23,29.7 63.1,29.57 R14.3 ; 63.6,29.7 R14.2 ; v1(67.5,31.3) 67.05,30.85 Q8.4 67.05,29.65 66.65,29.25 66.05,29.25 65.75,28.95 Q8.1
  TOP w0.25: C9.1 56.56,13.44 55.97,14.03 55.88,14.03 55.53,14.38 U4.19 ; C12.1 60.75,30.9 v1(60.05,30.2) 60.05,29.7 60.28,29.47 U4.50 ; v3(43.25,16.09) C14.1 43.75,16.95 43.98,17.18 U4.100 ; U4.6 v1(49.03,16.51) ; U4.28 61.13,18.18 61.3,18.35 C11.1 v1(61.85,19.12) ; C13.1 v1(45.8,31.23) 46.09,30.93 U4.75 ; R11.1 33.44,14.86 v1(33.44,15.43) 33.43,15.44 33.43,15.8 33.68,16.05 Q4.1 ; C10.1 51.53,14.48 U4.11 51.53,16.3 51.78,16.55 51.79,16.55 v1(51.8,16.55)
  TOP w0.3: U5.36 14.18,34.8 v1(13.1,34.8) C49.1 ; C47.1 v1(11.52,35.85) ; v1(22.6,48.5) 20.64,48.5 18.55,50.59 SW1.2 ; C50.1 v1(13.1,33.45) 14.11,33.45 U5.37 ; v1(56.8,12.7) 56.8,12.8 56.56,13.04 C9.1 ; v1(60.35,11.9) C7.2 59.53,12.53 L2.2 ; C48.1 v1(13.15,29.7) 13.55,29.7 13.59,29.73 U5.40
  TOP w0.4: Q9.1 v2(71.6,21.05) ; Q7.1 72.45,17.5 72.2,17.75 v2(72.2,18.03) ; Q4.4 v1(35.9,17.95) ; Q5.1 v2(71.6,13.05)
  TOP w0.5: v3(27.05,23.33) 27.05,23.3 27.25,23.1 27.25,22.6 C52.1 ; C51.1 20.55,22.6 20.55,23.15 20.7,23.3 v3(20.7,23.33) ; C42.1 67.09,15.91 v1(67.09,16.43)
  TOP w0.6: C21.1 v3(38.25,15.6)
  TOP w1: 36.83,5.6 40.9,5.6 41.91,4.59 J6.4 ; 36.83,5.6 J6.2 ; 36.83,5.6 36.83,7.27 36.4,7.7 v3(36.4,9.3) v3(37.45,9.3)
  BOTTOM w0.5: J8.1 v1(65.1,30.43)
  vias: v3(40.25,40.5) v3(40.87,39.94) v3(41.37,40.64)
+3V3_MICROSD: length 21
  TOP w0.18: 32.78,14.27 32.78,13.75 ; 32.78,14.27 32.8,14.25 R11.2 ; 32.78,14.27 32.7,14.35 ; 32.78,13.75 32.78,13.38 32.96,13.2 R11.4 ; 32.78,13.75 R11.3
  TOP w0.3: 31.9,16.55 31.9,17.8 32.5,18.4 v1(33.05,18.4) ; 31.9,16.55 C22.1 ; 31.9,16.55 31.9,15.15 32.7,14.35
  TOP w0.4: v1(33.05,18.4) 33.05,18.35 33.45,17.95 Q4.6 ; J9.4 24.4,16.96 v1(24.39,16.95)
  BOTTOM w0.4: v1(33.05,18.4) 32.4,18.4 32.25,18.55 25.76,18.55 24.39,17.18 v1(24.39,16.95)
+5.0V: length 28.3
  TOP w0.15: R4.6 47.2,35.95 47.31,36.06 47.38,36.06 47.38,36.06 v1(47.38,36.06) ; R12.3 67.55,17.25 ; 67.55,17.25 v1(68.1,17.25) R12.4 ; 67.55,17.25 67.27,17.25 67.05,17.48 R12.2
  TOP w0.18: C1.1 34.6,43.2
  TOP w0.25: U3.5 47.9,39.4 v1(48.3,39) C6.1
  TOP w0.3: 34.6,43.2 34.6,42.45 34.95,42.1 U1.3 ; D7.A v1(82.4,35.75) ; D6.A v1(82.45,19.15) ; D5.A v1(82.4,2.55) ; D1.A v1(13.77,20)
  TOP w0.4: Q9.4 74.35,22.95 74.42,23.02 v2(75.25,23.02) ; v2(74.85,18.73) 74.85,18.83 74.72,18.95 Q7.4 ; v2(75.25,14.55) 74.85,14.95 Q5.4 ; v1(66,42.65) 66.01,42.66 D2.A
  TOP w0.66: C43.1 40.5,37.15 v3(38.75,37.15)
  L3-PWR w0.254: J7.2 73.9,30.43 ; J7.2 73.7,31.6 ; J7.2 73.7,29.26 ; J7.2 72.53,31.8
  vias: v1(32.8,37.75) v1(32.8,36.75) v1(32.8,35.75) v1(32.8,34.75) v1(32.8,33.75) v1(32.8,32.75) v1(33.8,37.75) v1(33.8,36.75) v1(33.8,35.75) v1(33.8,34.75) v1(33.8,33.75) v1(33.8,32.75) v1(34.8,37.75) v1(34.8,36.75) v1(34.8,35.75) v1(34.8,34.75) v1(34.8,33.75) v1(34.8,32.75) v1(35.8,37.75) v1(35.8,36.75) v1(35.8,35.75) v1(35.8,34.75) v1(35.8,33.75) v1(35.8,32.75) v1(36.8,37.75) v1(36.8,36.75) v1(36.8,35.75) v1(36.8,34.75) v1(36.8,33.75) v1(36.8,32.75) v1(37.8,37.75) v1(37.8,36.75) v1(37.8,35.75) v1(37.8,34.75) v1(37.8,33.75) v1(37.8,32.75) v3(7.3,32.25) v3(7.3,31.4) v3(7.3,30.55) v3(31.85,38) v3(31.85,37.15) v3(31.85,36.3) v3(31.85,35.45) v3(31.85,34.6) v3(31.85,33.75) v3(31.85,32.9) v3(31.85,32.05) v3(31.85,31.2) v3(32.75,31.6) v3(32.75,30.75) v3(33.6,31.6) v3(33.6,30.75) v3(34.2,44.6) v3(34.45,31.6) v3(34.45,30.75) v3(35.15,44.6) v3(35.3,31.6) v3(35.3,30.75) v3(35.7,45.45) v3(36.15,31.6) v3(36.15,30.75) v3(37,31.6) v3(37,30.75) v3(37.85,31.6) v3(37.85,30.75) v3(38.75,38) v3(38.75,36.3) v3(38.75,35.45) v3(38.75,34.6) v3(38.75,33.75) v3(38.75,32.9) v3(38.75,32.05) v3(38.75,31.2)
+VIN: length 52.9
  TOP w0.7: D3.A 8.32,12.18 10.55,9.95 10.55,7.12 12.66,5.01 J1.1
  BOTTOM w0.6: J1.1 17.59,5.01 21.54,1.06 50.59,1.06 J6.8
+VIN_PROTECTED: length 52.1
  TOP w0.15: R6.1 43.65,34.85 42.55,33.75 42.55,31.93 41.12,30.5 C2.1
  TOP w0.8: C2.1 40.15,29.24 38.96,28.05 U2.3 37.09,27.55 v3(35.9,27.55) 35.9,26.65 v3(35.95,26.6) ; D3.C 15.1,14.5 v3(17,16.4) v3(17,17.45)
  BOTTOM w0.8: v3(35.9,27.55) 35.9,26.65 v3(35.95,26.6) 38.5,24.05 38.5,22.8 37.69,21.99 37.69,21.99 37.2,21.51 37.2,21.5 36.15,20.45 35,20.45 34.15,19.6 24.85,19.6 24.35,19.1 17.74,19.1 17,18.36 v3(17,17.45) v3(17,16.4)
GND: length 203.3
  TOP w0.15: R12.8 65.25,19.3 65,19.05 64.83,19.05 v1(63.92,18.15) ; Q1.1 39.95,21.25 39.8,21.4 v1(39.8,21.49) ; R13.3 38.43,19.68 38.8,20.05 v1(38.8,20.1) ; R4.7 47.07,36.45 47.18,36.56 47.18,36.56 47.27,36.65 v1(47.27,37.35) 46.93,37 R4.8 ; Q12.1 v1(45.75,42) 45.75,41.48 45.95,41.27 45.95,41 46.25,40.7 Q12.4 ; v1(46.35,11.68) R5.5 46.83,12.3 46.98,12.45 46.98,12.65 46.78,12.85 R5.6 ; Q1.4 v1(41.85,18.85) ; R11.5 v1(34.7,12.57)
  TOP w0.18: Q6.1 69.38,12.98 v1(69.38,12.3) ; Q6.4 v1(70.75,15.7) ; v1(71.25,21.9) 70.75,22.4 Q11.4 ; Q10.4 70.75,19.55 70.57,19.73 v1(70.54,19.73) ; Q10.1 v1(68.8,17.05) ; v1(69.45,21.8) Q11.1 ; C7.4 61.74,13.17 v1(62.05,12.86) 61.72,12.53 C7.3
  TOP w0.2: Q2.4 43.3,13.05 v1(43.3,12.52) ; Q2.1 v1(40.77,14.5)
  TOP w0.25: v1(60.75,29.95) 61.1,29.6 C17.2 ; C12.2 62.45,30.95 v1(62.45,31.65) ; v1(48.4,36.5) 48.3,36.6 C6.2 ; v1(46.58,32.1) 46.65,32.1 47.03,31.72 U4.74 ; C22.2 33.35,17.45 33.65,17.15 33.65,16.92 v1(33.72,16.85) ; C18.2 v1(48.5,13.3) ; U4.99 43.42,17.68 C14.2 v3(43.25,18.71) ; C13.2 v1(44.9,31.23) ; U4.10 v1(51.03,16.55) ; v1(55.8,13.31) 55.95,13.16 55.95,12.55 C19.2 ; U4.20 v1(56.03,16.51) ; U4.27 61.12,17.68 61.35,17.45 C11.2 v1(61.85,16.68) ; C10.2 v1(49.53,14.18)
  TOP w0.254: 31.76,28.05 U2.1 ; U2.1 33.01,30 ; U2.1 34.26,28.05 ; 18.1,8.5 J9.10 17.15,7.65 ; 24.55,20.13 C51.2 ; C51.2 22.93,21.7 ; C51.2 26.17,21.7 ; 44.85,42.65 Q12.1 44.1,42 ; 7.6,42.05 C44.2 ; C44.2 9.1,42.05 ; C44.2 8.35,42.82 ; 12.35,31.78 C50.2 11.6,32.55 ; 72.53,23.98 J7.6 ; J7.6 73.9,25.35 ; J7.6 73.7,24.18 ; J7.6 71.36,26.52 ; J7.6 71.36,24.18 ; J7.6 73.7,26.52 ; 40.75,35.85 C43.2 42.32,34.5 ; 31.43,21.7 C52.2 33.05,20.13 ; 58.78,11.4 C53.2 58.14,12.08 ; 10.35,38.67 C47.2 9.18,37.65
  TOP w0.3: U3.2 v1(43.83,38.75) ; J9.10 v1(18.1,6.78) ; R10.1 v1(14.07,17.25) ; C49.2 v1(13.1,35.7) ; 13.48,42.44 U5.30 v1(15.07,42.44) ; 29.6,27.2 U5.2 v1(31.17,27.2) ; C48.2 v1(13.2,28.8) ; J9.6 22.2,17.15 v1(22.35,17) ; 29.62,44.98 U5.16 v1(31.17,44.98) ; U5.28 v1(14.2,45.85) ; R18.2 v1(32.15,43.15) ; v1(61.18,14.24) 61.16,14.25 C5.2 ; v1(13.35,25.93) 14.88,25.93 ; U5.38 v1(15.07,32.27) ; C9.2 v1(57.8,13.4) ; C20.1 v1(14.1,18.25) ; v1(15.07,39.9) U5.32 13.5,39.9 ; C47.2 v1(11.52,37.65) ; C50.2 v1(13.1,32.55) ; 29.62,25.93 v1(31.17,25.93) ; U5.27 v1(15.9,45.88)
  TOP w0.4: U5.55 26.75,32.4 ; U5.55 26.75,29.5 ; U5.55 25.3,30.95 ; U5.55 28.2,30.95 ; U5.59 25.2,33.95 ; U5.59 22.3,33.95 ; U5.59 23.75,35.4 ; U5.59 23.75,32.5 ; 25.3,36.95 U5.57 ; U5.57 26.75,35.5 ; U5.57 26.75,38.4 ; U5.57 28.2,36.95 ; 15.05,45 U5.27 15.9,44.15 ; 19.3,36.95 U5.63 ; U5.63 20.75,38.4 ; U5.63 20.75,35.5 ; U5.63 22.2,36.95 ; U5.61 22.2,30.95 ; U5.61 19.3,30.95 ; U5.61 20.75,32.4 ; U5.61 20.75,29.5 ; U5.60 23.75,38.4 ; U5.60 22.3,36.95 ; U5.60 25.2,36.95 ; U5.60 23.75,35.5 ; U5.58 25.2,30.95 ; U5.58 23.75,29.5 ; U5.58 23.75,32.4 ; U5.58 22.3,30.95 ; 19.3,33.95 U5.62 ; U5.62 20.75,32.5 ; U5.62 20.75,35.4 ; U5.62 22.2,33.95 ; U5.56 28.2,33.95 ; U5.56 25.3,33.95 ; U5.56 26.75,35.4 ; U5.56 26.75,32.5 ; 15.05,44.98 U5.28 13.35,44.98 ; J5.5 11.58,21.52
  TOP w0.5: L3.2 C44.1 6.8,41.15 ; U5.58 v1(22.41,32.29) ; C16.2 45.64,33 45.6,32.96 v1(45.56,32.96) ; U5.63 v1(19.41,38.29) ; U5.56 v1(25.41,35.29) ; U5.57 v1(25.41,38.29) ; C52.2 v3(33.05,23.36) ; U5.60 v1(22.41,38.29) ; v1(67.2,12.57) 67.2,13.2 C42.2 ; U5.61 v1(19.41,32.29) ; U5.62 v1(19.41,35.29) ; U5.59 v1(22.41,35.29) ; C51.2 v3(24.55,23.36) ; U5.55 v1(25.41,32.29)
  TOP w0.6: C21.2 v3(38.25,14.25)
  TOP w0.76: J12.10 v2(82.3,39.63) ; J10.10 v2(82.3,6.47) ; J11.10 v2(82.3,23.05)
  TOP w0.8: U2.1 v3(33.01,25.85) v3(33.95,25.85) ; v3(42.38,34.9) 41.15,34.9 C43.2 ; v3(41.38,32.3) C2.2
  L2-GND w0.254: J7.6 73.7,26.52 ; J7.6 71.36,26.52 ; J7.6 73.9,25.35 ; J7.6 73.7,24.18
  BOTTOM w0.25: J8.7 66.88,26.7 v1(68.45,26.7) 68.45,25.55 68.25,25.35 J8.9
  BOTTOM w0.3: J8.5 v1(65.15,27.89) ; J8.3 v1(65.15,29.16)
  vias: v1(0.85,46.75) v1(0.85,39.5) v1(1.85,47.75) v1(1.85,46.75) v1(1.85,39.5) v1(1.85,38.5) v1(2.85,47.25) v1(2.85,46.25) v1(2.85,39.5) v1(2.85,38.5) v1(2.85,37) v1(3.1,49) v1(3.85,47.25) v1(3.85,46.25) v1(3.85,39.5) v1(3.85,38.5) v1(4.35,50.25) v1(4.85,47.25) v1(4.85,46.25) v1(4.85,39.5) v1(4.85,38.5) v1(4.85,37) v1(4.85,35) v1(5.6,51.5) v1(5.85,49.5) v1(5.85,47.25) v1(5.85,46.25) v1(5.85,39.5) v1(5.85,38.5) v1(6.85,52.25) v1(6.85,47.25) v1(6.85,46.25) v1(6.85,39.5) v1(6.85,38.5) v1(6.85,37) v1(6.85,35) v1(6.85,33.25) v1(7.1,45.25) v1(7.1,44.25) v1(7.1,43.25) v1(7.1,42.3) v1(7.6,49.5) v1(7.75,52.25) v1(7.85,47.25) v1(7.85,46.25) v1(7.85,43) v1(7.85,40) v1(7.85,39) v1(8.1,45) v1(8.1,44) v1(8.35,36.75) v1(8.35,34.25) v1(8.85,43) v1(8.85,40) v1(8.85,39) v1(9.1,44) v1(9.35,46.5) v1(9.6,34.75) v1(9.6,33.25) v1(9.85,43.25) v1(9.85,42.25) v1(9.85,40) v1(9.85,39) v1(10.35,51.95) v1(10.35,49.25) v1(10.6,45.25) v1(10.85,43.25) v1(10.85,42.25) v1(10.85,40) v1(10.85,39) v1(11.35,34.75) v1(11.35,33.25) v1(11.85,43.25) v1(11.85,42.25) v1(11.85,40) v1(11.85,39) v1(12.6,45.25) v1(12.9,52.25) v1(12.9,49.25) v1(12.85,43.25) v1(12.85,42.25) v1(12.85,40) v1(12.85,39) v1(13.1,47.5) v1(13.1,37.25) v1(15.15,52.35) v1(15.35,43.75) v1(15.35,27.25) v1(15.6,29.5) v1(15.85,37.25) v1(15.85,33.75) v1(16.35,24.25) v1(17.15,52.35) v1(17.6,46) v1(17.85,42.25) v1(18.1,27) v1(20.1,46) v1(21.35,42.25) v1(21.6,27) v1(23.6,52.25) v1(24.35,42.25) v1(24.6,46.5) v1(25.35,27) v1(26.35,52.25) v1(27.1,46.5) v1(27.6,42.25) v1(28.6,27.05) v1(28.85,52.25) v1(29.1,43.75) v1(29.1,41.5) v1(29.1,37.25) v1(29.6,46.5) v1(31.35,41.5) v1(31.35,29.25) v1(31.9,46.45) v1(35.95,46.65) v1(36.35,52.25) v1(38.6,4) v1(39.1,52.25) v1(41.1,25.25) v1(41.35,29.75) v1(41.6,52.25) v1(41.55,8.2) v1(42.35,17.5) v1(42.35,16) v1(42.85,37.75) v1(43.6,4) v1(44.1,52.25) v1(45,6.65) v1(45.6,47.75) v1(46.1,44.65) v1(46.1,9.75) v1(46.6,52.25) v1(47.35,20.75) v1(48.35,8.75) v1(48.85,47.75) v1(48.85,22.5) v1(49.8,9.85) v1(50.6,52.25) v1(50.6,38.75) v1(50.6,36.25) v1(51.85,1) v1(52.1,47.75) v1(53.35,52.25) v1(53.45,41.3) v1(53.8,6.6) v1(54.1,37.5) v1(54.1,3.75) v1(54.7,9.85) v1(54.85,1) v1(55.35,33.25) v1(55.85,52.25) v1(56.3,44.3) v1(56.4,5.75) v1(56.6,37.5) v1(56.55,8.6) v1(56.85,34.5) v1(57.1,41.75) v1(57.6,47.75) v1(58.35,52.25) v1(60.75,44.8) v1(60.85,52.25) v1(61.5,40.75) v1(62.6,45.5) v1(62.6,43) v1(62.65,5.5) v1(63.6,52.25) v1(64.05,32.25) v1(64.6,45.5) v1(64.6,43) v1(65.6,5.3) v1(65.85,31.55) v1(66.1,52.25) v1(66.65,35.25) v1(67.9,10.65) v1(68.1,52.25) v1(68.15,6.8) v1(68.35,36.75) v1(69.25,33.8) v1(69.6,47.75) v1(69.85,8.65) v1(70.1,44.25) v1(70.1,36.75) v1(71.35,52.25) v1(71.35,1) v1(71.55,2.7) v1(72.55,4.4) v1(72.85,41) v1(72.85,39.25) v1(73.7,16.2) v1(73.85,52.25) v1(73.85,47.75) v1(74.2,22.05) v1(74.1,1) v1(75.3,6.6) v1(75.6,46.5) v1(75.85,52.25) v1(76.1,41) v1(76.1,39.25) v1(76.1,1) v1(76.4,17.3) v1(76.5,2.7) v1(76.7,4.45) v1(77.85,52.25) v1(78.15,17.2) v1(78.1,1) v1(79.05,14.6) v1(79.7,6.45) v1(79.85,52.25) v1(80.1,1) v1(81.85,52.25) v1(82.1,1) v1(83.35,51.25) v1(83.35,49.25) v1(83.35,47.25) v1(83.35,39.75) v1(83.35,37.75) v1(83.35,35) v1(83.35,33) v1(83.35,31) v1(83.35,23) v1(83.35,21) v1(83.35,19) v1(83.35,17) v1(83.35,15) v1(83.35,6.5) v1(83.35,4.5) v1(83.35,2.5) v3(12.6,21.3) v3(12.6,20.45) v3(12.6,19.6) v3(35.95,41.05) v3(35.95,40.15) v3(37.75,43.8) v3(37.75,42.9) v3(37.75,42)
VIN_COMP_LOGIC: length 55.4
  TOP w0.15: U3.4 47.65,38.1 47.77,37.98 47.77,36.88 47.9,36.76 47.9,36.29 48.19,36 48.25,36 48.4,35.85 48.4,35.15 48.25,34.99 44.84,34.99 42.9,33.05 42.9,30.76 41.94,29.8 41.94,29.4 38.66,26.12 38.07,26.12 37.45,25.5 35.13,25.5 34.73,25.1 13.45,25.1 12.8,25.75 12.8,26.9 11.75,27.95 11.75,31.65 11.1,32.3 Q3.1
VIN_REF: length 3.4
  TOP w0.15: 44.6,36.5 44.6,37.5 44.75,37.65 U3.3 ; 44.6,36.5 44.6,36.14 44.79,35.95 R4.3 ; 44.6,36.5 44.65,36.45 R4.2
/CC_CS: length 35
  TOP w0.15: v1(48.7,41) 49.23,41 49.9,40.33 49.9,39.5 49.5,39.1 49.5,35.48 50.93,34.05 50.93,33.47 51.53,32.87 U4.65 ; U5.8 30.31,34.8 31,34.8 31.15,34.95 31.15,38.4 31.5,38.75 42.4,38.75 43.44,39.8 43.71,39.8 43.75,39.84 43.76,39.84 43.98,40.05 v1(45.05,40.05)
  BOTTOM w0.15: v1(48.7,41) 46.1,41 45.05,39.95 v1(45.05,40.05)
/CC_HIB: length 36.4
  TOP w0.15: v1(29.4,29.5) 29.63,29.73 U5.4 ; v1(47.53,17) U4.3
  BOTTOM w0.15: v1(29.4,29.5) 30.73,28.18 44.98,28.18 46.91,26.24 46.91,25.04 46.85,24.98 46.85,24.95 44.55,22.65 43.5,22.65 42.2,21.35 42.2,20.7 42.7,20.2 43.81,20.2 47.01,17 v1(47.53,17)
/CC_RESET: length 88.4
  TOP w0.15: R5.3 44.52,12.85 44.23,12.55 44.23,12.08 44.6,11.71 44.6,11.78 44.67,11.78 v1(44.67,11.69) 44.01,11.03 44.01,10.83 v1(43.64,10.46) ; v1(59,22.17) 59.51,22.68 U4.37 ; U5.35 14.85,36.09 16.6,34.34 16.6,28.14 16.47,28.01 v1(16.47,27.48)
  BOTTOM w0.15: v1(16.47,27.48) 16.47,26.93 17.49,25.9 19.63,25.9 22.25,23.28 22.25,21 21.3,20.05 17.81,20.05 16.38,18.61 16.38,16.14 16.74,15.78 18.38,15.78 18.9,16.3 21.92,16.3 22.07,16.15 23.63,16.15 24.63,15.15 25.88,15.15 27.12,16.4 32.2,16.4 32.94,15.66 32.94,15.22 33.23,14.93 39.17,14.93 v1(43.64,10.46) ; v1(44.67,11.69) 44.67,12.21 47.74,15.29 49.06,15.29 50.23,16.46 50.23,16.88 50.8,17.45 53.73,17.45 54.07,17.1 54.6,17.1 54.93,17.43 57.5,17.43 58.8,18.72 58.8,19.7 58.35,20.15 58.35,22.05 58.47,22.17 v1(59,22.17)
/ENABLE_UART_TX_PULLUP_GOPORT1: length 67.8
  TOP w0.15: U4.2 47.03,14.55 47.68,13.91 47.68,12.07 47.55,11.94 47.55,10.68 47.8,10.43 47.8,8 ; 47.8,8 43.57,8 40.95,10.62 37.08,10.62 36.95,10.75 36.8,10.9 36.8,14.1 36.5,14.4 36.5,15.85 35.5,16.85 35.15,16.85 34.6,17.4 Q4.5 ; 47.8,8 60.27,8 61.37,9.1 64.55,9.1 v1(65.25,8.4) ; R14.8 64.15,26.69 64.52,26.32 v1(65.05,26.32)
  BOTTOM w0.15: v1(65.05,26.32) 64.65,25.92 64.65,21.1 64.53,20.98 64.53,20.56 64.67,20.42 64.67,19.41 66.25,17.83 66.25,13.59 65.25,12.59 v1(65.25,8.4)
/ENABLE_UART_TX_PULLUP_GOPORT2: length 10.8
  TOP w0.15: 63.6,25.55 62.83,25.55 62.13,24.85 61.17,24.85 61,24.68 U4.41 ; 63.6,25.55 65.1,25.55 66.4,26.85 Q8.2 ; 63.6,25.55 R14.7
/ENABLE_UART_TX_PULLUP_GOPORT3: length 12.3
  TOP w0.15: 62.1,26.65 62.1,29.45 63.58,30.93 66.25,30.93 66.4,30.78 Q8.5 ; 62.1,26.65 61.13,25.68 U4.43 ; 62.1,26.65 62.62,26.65 63.1,27.12 R14.6
/EXTERNAL_RESET: length 85.7
  TOP w0.15: J7.5 69,26.34 69,27 68.4,27.6 68.4,31.6 67.5,32.5 65.24,32.5 64.3,33.44 64.3,35.11 v1(62.33,37.08) ; v1(53.85,19.75) v1(50,19.75) 49.3,19.75 47.43,17.88 46.95,17.88 45.02,15.95 v1(44.25,15.95) ; R4.5 47.75,35.4 v1(47.9,35.55) ; v1(42.26,10.45) 42.26,10.97 42.33,11.04 42.33,13.48 v1(42.7,13.85) Q2.5
  BOTTOM w0.15: v1(53.85,19.75) 53.48,20.12 53.48,21.77 53.6,21.89 53.6,22.31 53.57,22.34 53.57,23.63 53.77,23.83 53.77,31.86 53.65,31.99 53.65,32.4 58.51,37.26 60.99,37.26 61.18,37.08 v1(62.33,37.08) ; v1(42.26,10.45) 42.26,5.43 J6.3 ; v1(47.9,35.55) 47.9,33.87 48.96,32.81 48.96,29.43 49.85,28.53 49.85,23.4 49.63,23.18 49.63,20.12 v1(50,19.75) ; v1(44.25,15.95) 42.7,14.4 v1(42.7,13.85)
/INT_GOPORT1: length 38.9
  TOP w0.15: J10.3 76.84,11.36 v1(76.7,11.5) ; v1(75.5,11.4) 74.97,11.4 74.67,11.7 66.7,11.7 65.55,12.85 v1(65.55,13.6) ; v1(54.5,29.85) 54.35,29.85 54.03,30.17 U4.60
  L2-GND w0.15: v1(64,20.67) 63.07,21.6 61.8,21.6 59.8,23.6 58.6,23.6 57.9,24.3 57.9,25.67 57.4,26.17 57.4,27.95 55.45,29.9 55.08,29.9 55.02,29.85 v1(54.5,29.85)
  BOTTOM w0.15: v1(75.5,11.4) 76.07,11.4 76.17,11.5 v1(76.7,11.5) ; v1(64,20.67) 64.37,20.3 64.37,19.29 65.95,17.71 65.95,14 v1(65.55,13.6)
/INT_GOPORT2: length 33.7
  TOP w0.15: U4.61 53.53,30.02 55,28.55 57.18,28.55 57.33,28.7 v1(57.85,28.7) ; v1(76.65,28.4) 77.11,27.94 J11.3
  L2-GND w0.15: v1(76.65,28.4) 76.1,27.85 76.1,26.08 73.72,23.7 72.14,23.7 71.59,24.25 70.64,24.25 70.49,24.1 69.55,24.1 69.48,24.17 68.57,24.17 66.52,22.12 65.17,22.12 65.07,22.22 65.03,22.22 63.85,23.4 63.85,23.71 63.24,24.32 63.24,24.33 62.95,24.62 62.71,24.62 59,28.33 58.22,28.33 v1(57.85,28.7)
/INT_GOPORT3: length 35.2
  TOP w0.15: J12.3 73.92,44.52 70.9,41.5 70.9,40.52 65.4,35.02 64.9,35.02 62.85,37.08 v1(62.85,37.6) ; U4.62 53.05,30.95 v1(53.05,32.2)
  BOTTOM w0.15: v1(62.85,37.6) 62.3,37.6 62.15,37.75 58.08,37.75 53.05,32.73 v1(53.05,32.2)
/MICRO_SD_CARD_INSERTED: length 65.9
  TOP w0.15: J9.9 19.1,18.1 v1(19.1,16.8) ; U4.48 55.44,28.18 55.07,27.81 55.07,27.44 54.78,27.15 53.7,27.15 52.65,28.2 49.45,28.2 47.55,30.1 46.05,30.1 45.85,29.9 43.83,29.9 43.2,29.27 43.2,28.87 39.18,24.85 38.73,24.85 37.93,24.05 35.63,24.05 34.8,23.22 34.8,20.03 35.85,18.98 v1(38.45,18.98) 39.3,19.82 39.3,20.35 39,20.65 38.4,20.65 38.08,20.32 R13.4
  BOTTOM w0.15: v1(38.45,18.98) 37.17,18.98 36.75,18.55 35.6,18.55 34.8,17.75 34.8,17.22 33.93,16.35 33.4,16.35 32.75,17 27.2,17 27,17.2 26.5,17.2 26.21,16.91 26.21,16.49 26.22,16.48 26.22,16.17 26.22,15.92 25.75,15.45 24.75,15.45 23.76,16.45 22.19,16.45 21.84,16.8 v1(19.1,16.8)
/MICROSD_CS: length 54.2
  TOP w0.15: v1(26.71,16.7) 26.71,17.14 26.6,17.25 J9.2 ; v1(58.88,21.45) 59.25,21.45 59.48,21.68 U4.35 ; v1(47.15,9.8) 47.15,9.28 46.38,8.5 43.5,8.5 40.05,11.95 40.05,13.65 39.65,14.05 39.65,15.4 39.9,15.65 v1(39.9,17.4)
  BOTTOM w0.15: v1(39.9,17.4) 38.65,17.4 37.3,16.05 33.28,16.05 32.63,16.7 v1(26.71,16.7) ; v1(47.15,9.8) 47.15,12 46.68,12.47 46.68,13.62 48.04,14.99 49.19,14.99 50.53,16.33 50.53,16.76 50.92,17.15 53.6,17.15 53.95,16.8 54.72,16.8 55.05,17.13 57.63,17.13 59.25,18.75 59.25,21.08 v1(58.88,21.45)
/PWR_CTRL_GOPORT1: length 15.3
  TOP w0.15: Q5.5 Q5.2 73.1,12.5 72.85,12.25 70.98,12.25 70.75,12.48 Q6.3 70.75,13.95 v1(70.7,14) ; R12.7 67.05,20.09 67.02,20.12 v1(67.02,20.12)
  BOTTOM w0.15: v1(70.7,14) 70.7,14.4 70.57,14.53 70.57,14.74 69.95,15.37 69.95,17.03 69.13,17.85 68.64,17.85 67.65,18.84 67.65,19.5 v1(67.02,20.12)
/PWR_CTRL_GOPORT2: length 14.1
  TOP w0.15: R12.6 67.55,19.75 67.7,19.9 69.97,19.9 70.29,20.23 70.78,20.23 70.93,20.07 72.54,20.07 73.1,19.52 Q7.5 Q7.2 73.1,16.5 72.85,16.25 70.2,16.25 69.45,15.5 Q6.6
/PWR_CTRL_GOPORT3: length 12.9
  TOP w0.15: R12.5 68.1,19.1 68.27,18.93 68.6,18.93 69.88,17.65 70.75,17.65 ; Q9.5 v1(73.1,21.9) Q9.2 ; 70.75,17.65 Q10.3 ; 70.75,17.65 71.1,18 v1(71.15,18)
  BOTTOM w0.15: v1(73.1,21.9) 72.57,21.38 72.57,21.07 71.8,20.3 70.41,20.3 70.04,19.93 70.04,19.49 71.15,18.37 v1(71.15,18)
/PWR_CTRL_MICROSD: length 53.2
  TOP w0.15: v1(62.29,21) 61.11,22.18 U4.36 ; v1(61.5,5.25) 59.4,7.35 43.38,7.35 40.7,10.03 36.83,10.03 36.7,10.15 36.2,10.65 36.2,13.85 35.25,14.8 R11.8
  TOP w0.18: R11.8 34.7,15.24 34.6,15.34 Q4.2
  BOTTOM w0.15: v1(62.29,21) 61.92,20.63 61.92,20.52 60.68,19.27 60.68,12.62 61.5,11.8 v1(61.5,5.25)
/RESET_MCU: length 57
  TOP w0.15: Q2.6 43.9,14.5 44.1,14.3 44.1,13.03 43.8,12.73 43.8,11.9 43.14,11.24 43.14,10.08 44.17,9.05 46.11,9.05 46.6,9.54 46.6,10 47.18,10.57 47.18,12.23 47.27,12.33 47.27,13.25 v1(47.18,13.35) R5.7 ; v1(62.34,10.51) 57.89,10.51 57.55,10.85 57.55,11.39 C53.1 57.05,11.4 56.85,11.2 56.85,10.7 v1(55.85,9.7) ; v1(52.52,16.52) 52.6,16.45 52.75,16.45 53.03,16.17 U4.14
  BOTTOM w0.15: v1(62.34,10.51) 62.34,11.44 62.75,11.85 62.75,14.6 62.35,15 62.35,16.88 62.1,17.13 62.1,18.67 62.35,18.92 62.35,20.2 62.85,20.7 62.85,21.26 60.83,23.28 60.83,24.73 61.45,25.35 J8.10 ; v1(55.85,9.7) 52.95,12.6 52.95,16.1 v1(52.52,16.52) 50.69,14.69 48.51,14.69 v1(47.18,13.35)
/SPI_CS_GOPORT1: length 72.5
  TOP w0.15: v1(46.11,25.37) 46.59,25.85 46.59,26.26 46.15,26.7 45.65,26.7 45.63,26.68 U4.81 ; v1(80.62,9.8) 80.91,10.09 J10.6
  BOTTOM w0.15: v1(46.11,25.37) 43.98,23.25 43.23,23.25 41.6,21.62 41.6,19.95 41.78,19.77 42.69,18.86 42.69,18.48 45.55,15.62 45.55,14.77 43.98,13.2 43.8,13.03 43.8,11.67 43.8,11.42 44.34,10.89 44.54,10.89 45.24,10.19 45.24,7.94 47.83,5.35 51.6,5.35 55.8,1.15 70.55,1.15 71.2,1.8 77.76,1.8 80.62,4.67 v1(80.62,9.8)
/SPI_CS_GOPORT2: length 83.9
  TOP w0.15: J11.6 v1(80.65,26.67) ; v1(70.05,5.45) 68.98,4.38 54.75,4.38 54.62,4.5 v1(54.1,4.5) ; U4.82 45.53,26.18 45.55,26.2 v1(45.85,26.2)
  BOTTOM w0.15: v1(70.05,5.45) 70.42,5.08 74.84,5.08 82.1,12.34 82.1,14.19 81.7,14.59 81.7,22.35 80.65,23.4 v1(80.65,26.67) ; v1(45.85,26.2) 46.38,26.2 46.61,25.97 46.61,25.17 44.39,22.95 43.35,22.95 41.9,21.5 41.9,20.58 42.58,19.9 42.6,19.9 43.24,19.26 43.48,19.26 45.85,16.89 45.85,14.65 45.67,14.47 44.1,12.9 44.1,11.55 44.46,11.19 44.66,11.19 45.18,10.66 45.54,10.31 45.54,8.06 47.95,5.65 52.01,5.65 53.16,4.5 v1(54.1,4.5)
/SPI_CS_GOPORT3: length 58.4
  TOP w0.15: v1(56.05,22.45) 54.45,24.05 52.43,24.05 51.64,24.84 50.04,24.84 49.75,24.55 46.22,24.55 45.61,25.17 45.61,25.53 45.46,25.68 U4.83 ; v1(66.09,36.41) 69.45,39.77 69.45,41.5 75.49,47.55 79.16,47.55 80.2,46.5 80.2,43.9 80.85,43.25 J12.6
  BOTTOM w0.15: v1(66.09,36.41) 64.89,35.22 61.65,35.22 61.18,34.75 61.18,33.9 59.01,31.73 59.01,31.4 57.84,30.23 57.51,30.23 57.25,29.97 57.25,27.28 56.05,26.08 v1(56.05,22.45)
A0: length 16.9
  TOP w0.15: U4.15 53.53,16.37 53.4,16.5 v1(53.4,16.65)
  BOTTOM w0.15: v1(53.4,16.65) 53.4,12.95 57.15,9.2 J4.1
A1: length 15.2
  TOP w0.15: v1(54.4,13.9) 54.4,14.34 54.03,14.71 U4.16
  BOTTOM w0.15: J4.2 58.7,3.53 58.7,8.45 54.4,12.75 v1(54.4,13.9)
A2: length 16.1
  TOP w0.15: U4.17 54.53,14.77 54.94,14.36 v1(54.96,14.36)
  BOTTOM w0.15: v1(54.96,14.36) 54.96,12.61 59.13,8.44 59.13,5.64 J4.3
A3: length 20.3
  TOP w0.18: v1(55.26,16.63) 55.18,16.55 55.18,16.27 55.03,16.13 U4.18
  BOTTOM w0.15: J4.4 62.81,4.5 61.2,4.5 59.43,6.27 59.43,9.02 57.3,11.15 57.3,13.75 55.26,15.79 v1(55.26,16.63)
A4: length 21.7
  TOP w0.15: v1(62.6,17.7) 62.6,19.08 61.8,19.88 61.8,20.23 61.36,20.68 U4.33
  BOTTOM w0.15: v1(62.6,17.7) 62.6,17.18 62.79,16.99 62.79,15.31 63.45,14.65 63.45,6.4 J4.5
A5: length 23.8
  TOP w0.15: v1(63.6,17.5) 63.23,17.87 63.23,18.88 62.1,20 62.1,20.36 61.28,21.18 U4.34
  BOTTOM w0.15: v1(63.6,17.5) 64.3,16.8 64.3,14.75 63.8,14.25 63.8,8.3 65.05,7.05 65.34,7.05 J4.6
CC_CTS: length 25
  TOP w0.15: v1(24.55,26.9) 24.55,26.14 U5.51 ; U4.85 43.08,24.68 42.35,23.95 39.1,23.95 37.92,22.77 37.81,22.77 37.79,22.75 37.38,22.75 37.36,22.77 v1(36.72,22.77)
  BOTTOM w0.15: v1(36.72,22.77) 34.82,22.77 33.4,21.35 30.1,21.35 v1(24.55,26.9)
CC_IRQ: length 46.2
  TOP w0.15: v1(49.25,25.06) 49.78,25.06 49.86,25.14 51.76,25.14 52.55,24.35 54.9,24.35 56.95,22.3 56.95,21.31 59.01,19.26 59.01,19.11 59.43,18.68 U4.29 ; v1(43.5,40.3) 42.55,40.3 41.3,39.05 31.38,39.05 30.95,38.62 U5.11
  BOTTOM w0.15: v1(49.25,25.06) 48.66,25.65 48.66,32.69 45.51,35.83 45.51,35.86 45.4,35.97 45.4,38.92 44.11,40.21 43.89,40.21 43.8,40.3 v1(43.5,40.3)
CC_MISO: length 39.7
  TOP w0.15: v1(29.45,33.55) 30.3,33.55 U5.7 ; U4.31 59.43,19.68 57.55,21.56 57.55,22.55 55.15,24.95 52.8,24.95 52.01,25.74 49.78,25.74 49.67,25.86 48.82,25.86 v1(47.21,27.46)
  BOTTOM w0.15: v1(29.45,33.55) 28.95,33.05 28.95,31.9 29.2,31.65 29.51,31.65 31.41,29.75 31.68,29.75 32.65,28.77 45.92,28.77 46.76,27.94 46.76,27.93 47.22,27.47 47.22,27.47 47.22,27.47 47.22,27.46 47.22,27.46 v1(47.21,27.46)
CC_MOSI: length 37.2
  TOP w0.15: v1(47.56,28.1) 49.5,26.16 49.79,26.16 49.91,26.04 52.13,26.04 52.92,25.25 55.27,25.25 57.85,22.67 57.85,21.75 59.42,20.18 U4.32 ; v1(29.45,32.27) U5.6
  BOTTOM w0.15: v1(29.45,32.27) 31.67,30.05 31.8,30.05 32.77,29.07 46.58,29.07 v1(47.56,28.1)
CC_RTS: length 34.8
  TOP w0.15: U4.84 43.16,25.18 42.23,24.25 38.98,24.25 37.98,23.25 v1(37.58,23.25) ; v1(17.25,26.85) 16.2,26.85 15.9,26.55 U5.44
  BOTTOM w0.15: v1(17.25,26.85) 17.9,26.2 19.75,26.2 22.55,23.4 22.55,23.18 22.55,22.93 25.03,20.45 33.87,20.45 34.62,21.2 35.95,21.2 37.58,22.83 v1(37.58,23.25)
CC_RX: length 30.2
  TOP w0.15: U4.86 43.01,24.18 42.48,23.65 39.23,23.65 37.83,22.25 v1(36.21,22.25) ; U5.47 19.8,25.99 v1(19.8,27)
  BOTTOM w0.15: v1(36.21,22.25) 34.8,22.25 33.6,21.05 25.28,21.05 23.15,23.18 23.15,23.65 v1(19.8,27)
CC_SCK: length 37.7
  TOP w0.15: v1(29.45,31) 30.3,31 ; U4.30 59.43,19.18 59.31,19.31 59.31,19.38 57.25,21.44 57.25,22.42 55.02,24.65 52.68,24.65 51.88,25.44 49.66,25.44 49.54,25.56 48.27,25.56 46.61,27.21 46.61,27.39 v1(46.23,27.76)
  BOTTOM w0.15: v1(46.23,27.76) 45.52,28.48 31.22,28.48 29.45,30.25 v1(29.45,31)
CC_TCXO_EN/SOP2: length 73.4
  TOP w0.15: R13.2 35.62,19.68 35.6,19.7 35.55,19.7 35.1,20.15 35.1,23.09 35.76,23.75 38.05,23.75 38.85,24.55 39.3,24.55 43.5,28.75 43.5,29.15 43.95,29.6 v1(46.35,29.6) 47.62,29.6 49.32,27.9 52.53,27.9 53.58,26.85 57.24,26.85 57.84,27.45 59.16,27.45 59.43,27.18 U4.46 ; v1(38.7,45.45) 37.94,45.45 36.19,47.2 24.52,47.2 23.82,46.5 22.39,46.5 22.14,46.25 21.5,46.25 20.98,45.73 U5.23
  BOTTOM w0.15: v1(46.35,29.6) 46.35,31.46 44.7,33.11 44.7,33.5 41.95,36.25 41.95,43.45 39.95,45.45 v1(38.7,45.45)
CC_TX: length 31.3
  TOP w0.15: U4.87 42.93,23.68 42.6,23.35 39.35,23.35 37.93,21.93 37.75,21.75 36.58,21.75 36.57,21.75 v1(35.67,21.75) ; U5.46 18.44,26.54 v1(18.95,27.05)
  BOTTOM w0.15: v1(18.95,27.05) 19.5,26.5 19.88,26.5 22.85,23.53 22.85,23.05 25.15,20.75 33.75,20.75 34.75,21.75 v1(35.67,21.75)
D0: length 31.1
  TOP w0.15: U4.64 52.03,32.31 53.1,33.38 53.1,39.37 61.63,47.9 v1(65.27,47.9)
  BOTTOM w0.15: v1(65.27,47.9) 66.27,48.9 69.2,48.9 69.85,49.55 J2.1
D1: length 29.2
  TOP w0.15: J2.2 67.31,47.71 66.7,47.1 61.25,47.1 53.4,39.25 53.4,33.26 52.53,32.39 U4.63
D2: length 42.9
  TOP w0.15: U4.26 59.64,17.18 58.85,17.97 58.85,18.7 v1(58.3,19.26)
  BOTTOM w0.15: v1(58.3,19.26) 57.76,19.26 57.55,19.05 56.05,19.05 54.87,20.23 54.87,25.75 56.65,27.53 56.65,30.22 57.26,30.83 57.59,30.83 58.41,31.65 58.41,31.98 60.58,34.15 60.58,34.75 60.58,35 61.4,35.82 62.62,35.82 63.95,37.14 63.95,48.73 64.77,49.55 J2.3
D3: length 42.7
  TOP w0.15: U4.25 58.53,16.13 56.46,18.21 v1(55.78,18.21)
  BOTTOM w0.15: J2.4 63.65,49.38 63.65,37.27 62.5,36.12 61.28,36.12 60.28,35.12 60.28,34.3 58.11,32.13 58.11,31.77 57.47,31.13 57.13,31.13 56.35,30.34 56.35,27.65 54.57,25.88 54.57,19.41 v1(55.78,18.21)
D4: length 22.3
  TOP w0.15: U4.51 58.53,41.7 v1(60.24,43.41)
  BOTTOM w0.15: J2.5 62,48.49 62,45.17 v1(60.24,43.41)
D5: length 40.9
  TOP w0.15: v1(53.1,22.1) 49.95,22.1 47.53,19.68 U4.95 ; v1(55.25,47.35) 55.25,48.9 J2.6
  BOTTOM w0.15: v1(53.1,22.1) 53.27,22.27 53.27,23.75 53.45,23.93 53.45,23.93 53.47,23.95 53.47,28.7 53.45,28.72 53.45,31.09 52.55,31.99 52.55,41.07 52.05,41.57 52.05,44.15 v1(55.25,47.35)
D6: length 41.3
  TOP w0.15: v1(52.1,21.55) 51.58,21.55 51.43,21.7 49.98,21.7 47.46,19.18 U4.96 ; v1(51.6,33.95) 49.8,35.75 49.8,38.98 54.61,43.79 J2.7
  BOTTOM w0.15: v1(52.1,21.55) 52.1,22.23 52.67,22.8 52.67,24 52.87,24.2 52.87,28.45 52.85,28.47 52.85,30.84 51.6,32.09 v1(51.6,33.95)
D7: length 40.6
  TOP w0.15: J2.8 50.26,48.99 v1(50.26,44.1) ; v1(55.07,18.05) 55.44,17.68 56.27,17.68 57.02,16.93 57.31,16.93 58.03,16.21 U4.24
  BOTTOM w0.15: v1(55.07,18.05) 54.52,18.6 54.29,18.6 52.65,20.24 52.65,21.71 52.55,21.81 52.55,22.26 52.97,22.68 52.97,23.88 53.17,24.08 53.17,28.57 53.15,28.59 53.15,30.97 52.25,31.87 52.25,40.95 50.26,42.94 v1(50.26,44.1)
D8: length 41.7
  TOP w0.15: v1(54.43,17.64) 54.85,17.23 56.02,17.23 56.62,16.63 57.18,16.63 57.53,16.28 U4.23 ; v1(49.53,44.1) 49.53,45.82 48.01,47.34 J3.1
  BOTTOM w0.15: v1(54.43,17.64) 51.6,20.48 51.6,22.16 52.37,22.93 52.37,24.13 52.57,24.33 52.57,28.32 52.55,28.35 52.55,30.72 51.1,32.17 51.1,34.16 51.8,34.86 51.8,40.25 49.53,42.52 v1(49.53,44.1)
D9: length 41.1
  TOP w0.15: v1(50.5,17.9) 49.55,17.9 48.03,16.38 U4.4 ; v1(48.81,44.1) 48.81,45.84 45.47,49.18 J3.2
  BOTTOM w0.15: v1(48.81,44.1) 48.81,42.82 51.5,40.13 51.5,34.98 50.8,34.28 50.8,32.05 52.25,30.6 52.25,28.22 52.27,28.2 52.27,24.45 52.07,24.25 52.07,23.05 51.3,22.28 51.3,20.07 51.3,18.7 v1(50.5,17.9)
D10: length 45.8
  TOP w0.15: U4.47 59.42,27.68 59.35,27.75 56.94,27.75 56.87,27.68 v1(55.65,27.68) ; J3.3 42.93,49.17 48.55,43.55 v1(52.55,43.55)
  BOTTOM w0.15: v1(55.65,27.68) 55.65,28.21 56.05,28.61 56.05,30.49 56.99,31.43 57.34,31.43 57.81,31.9 57.81,32.25 59.98,34.42 59.98,35.25 61.15,36.42 62.38,36.42 63.35,37.39 63.35,37.95 61.2,40.1 56,40.1 v1(52.55,43.55)
D11: length 64.6
  TOP w0.15: v1(66,37.65) 65.63,38.02 65.38,38.02 61.45,41.96 v1(61.45,46.47) 57.8,42.81 57.8,32.12 57.5,31.83 57.13,31.83 57.03,31.73 U4.54
  BOTTOM w0.15: J3.4 41.94,49.25 58.67,49.25 v1(61.45,46.47) ; J7.4 71.28,29.14 71.28,30.95 71.7,31.37 71.7,32.85 68.3,36.25 68.14,36.25 66.74,37.65 v1(66,37.65)
D12: length 56.1
  TOP w0.15: U4.53 57.53,30.08 57.91,29.7 59.05,29.7 59.46,30.11 59.46,31.44 60.92,32.9 62.32,32.9 63.05,33.63 v1(63.05,34.32) ; v1(60.1,42.55) 59.35,41.8 59.35,37.43 59.35,37.05 61.67,34.73 61.67,34.7 v1(62.04,34.33)
  BOTTOM w0.15: J7.1 69.99,31.7 67.41,34.28 63.7,34.28 63.66,34.32 v1(63.05,34.32) 62.53,34.32 62.52,34.33 v1(62.04,34.33) ; J3.5 39.7,48.95 55.12,48.95 56.7,47.37 56.7,45.95 v1(60.1,42.55)
D13: length 59.1
  TOP w0.15: U4.52 58.03,30.26 58.29,30 58.9,30 59.16,30.26 59.16,31.56 60.8,33.2 61.85,33.2 v1(62.3,33.65) 62.55,33.9 62.55,34.65 61.8,35.4 61.42,35.4 60.2,36.62 60.2,39.8 60.6,40.2 v1(60.6,42)
  BOTTOM w0.15: v1(60.6,42) 59.8,42 56.35,45.45 56.35,47.3 55,48.65 39.57,48.65 38.92,49.3 36.81,49.3 J3.6 ; J7.3 69.05,28.84 68.85,28.84 68.39,29.29 68.39,31.95 66.37,33.98 64.73,33.98 64.4,33.65 v1(62.3,33.65)
JTCK: length 20.3
  TOP w0.15: U4.76 46.06,29.18 46.19,29.05 47.75,29.05 49.2,27.6 52.4,27.6 53.45,26.55 57.86,26.55 v1(58.23,26.92)
  BOTTOM w0.15: J8.4 60.47,29.16 v1(58.23,26.92)
JTDI: length 20.2
  TOP w0.15: U4.77 47.69,28.68 50.03,26.34 52.26,26.34 53.05,25.55 55.91,25.55 56.29,25.18 v1(56.81,25.18)
  BOTTOM w0.15: v1(56.81,25.18) 58.37,25.18 58.64,25.45 59.25,25.45 60.42,26.62 J8.8
JTDO: length 22.5
  TOP w0.15: v1(51.77,26.84) 52.46,26.84 53.4,25.9 v1(56.75,25.9) ; U4.89 46.5,22.68 47.78,23.95 50.08,23.95 50.08,23.96 50.69,23.96 50.78,24.04 v1(51.3,24.04)
  BOTTOM w0.15: v1(51.3,24.04) 51.3,25.2 51.77,25.67 v1(51.77,26.84) ; J8.6 61.24,27.89 59.15,25.8 57.9,25.8 57.8,25.9 v1(56.75,25.9)
